# Altium PCB PCB1.PcbDoc (part 1 of 2)
Units mm, origin at the board's own origin, x right, y up, seen from the top; angles counter-clockwise.
Board outline 75.44 x 74.04 mm, 4 copper layers (Top, GND, PWR, Bottom), stack 0.603 mm thick; 52 components, 44 nets, 218 pads, 48 vias.
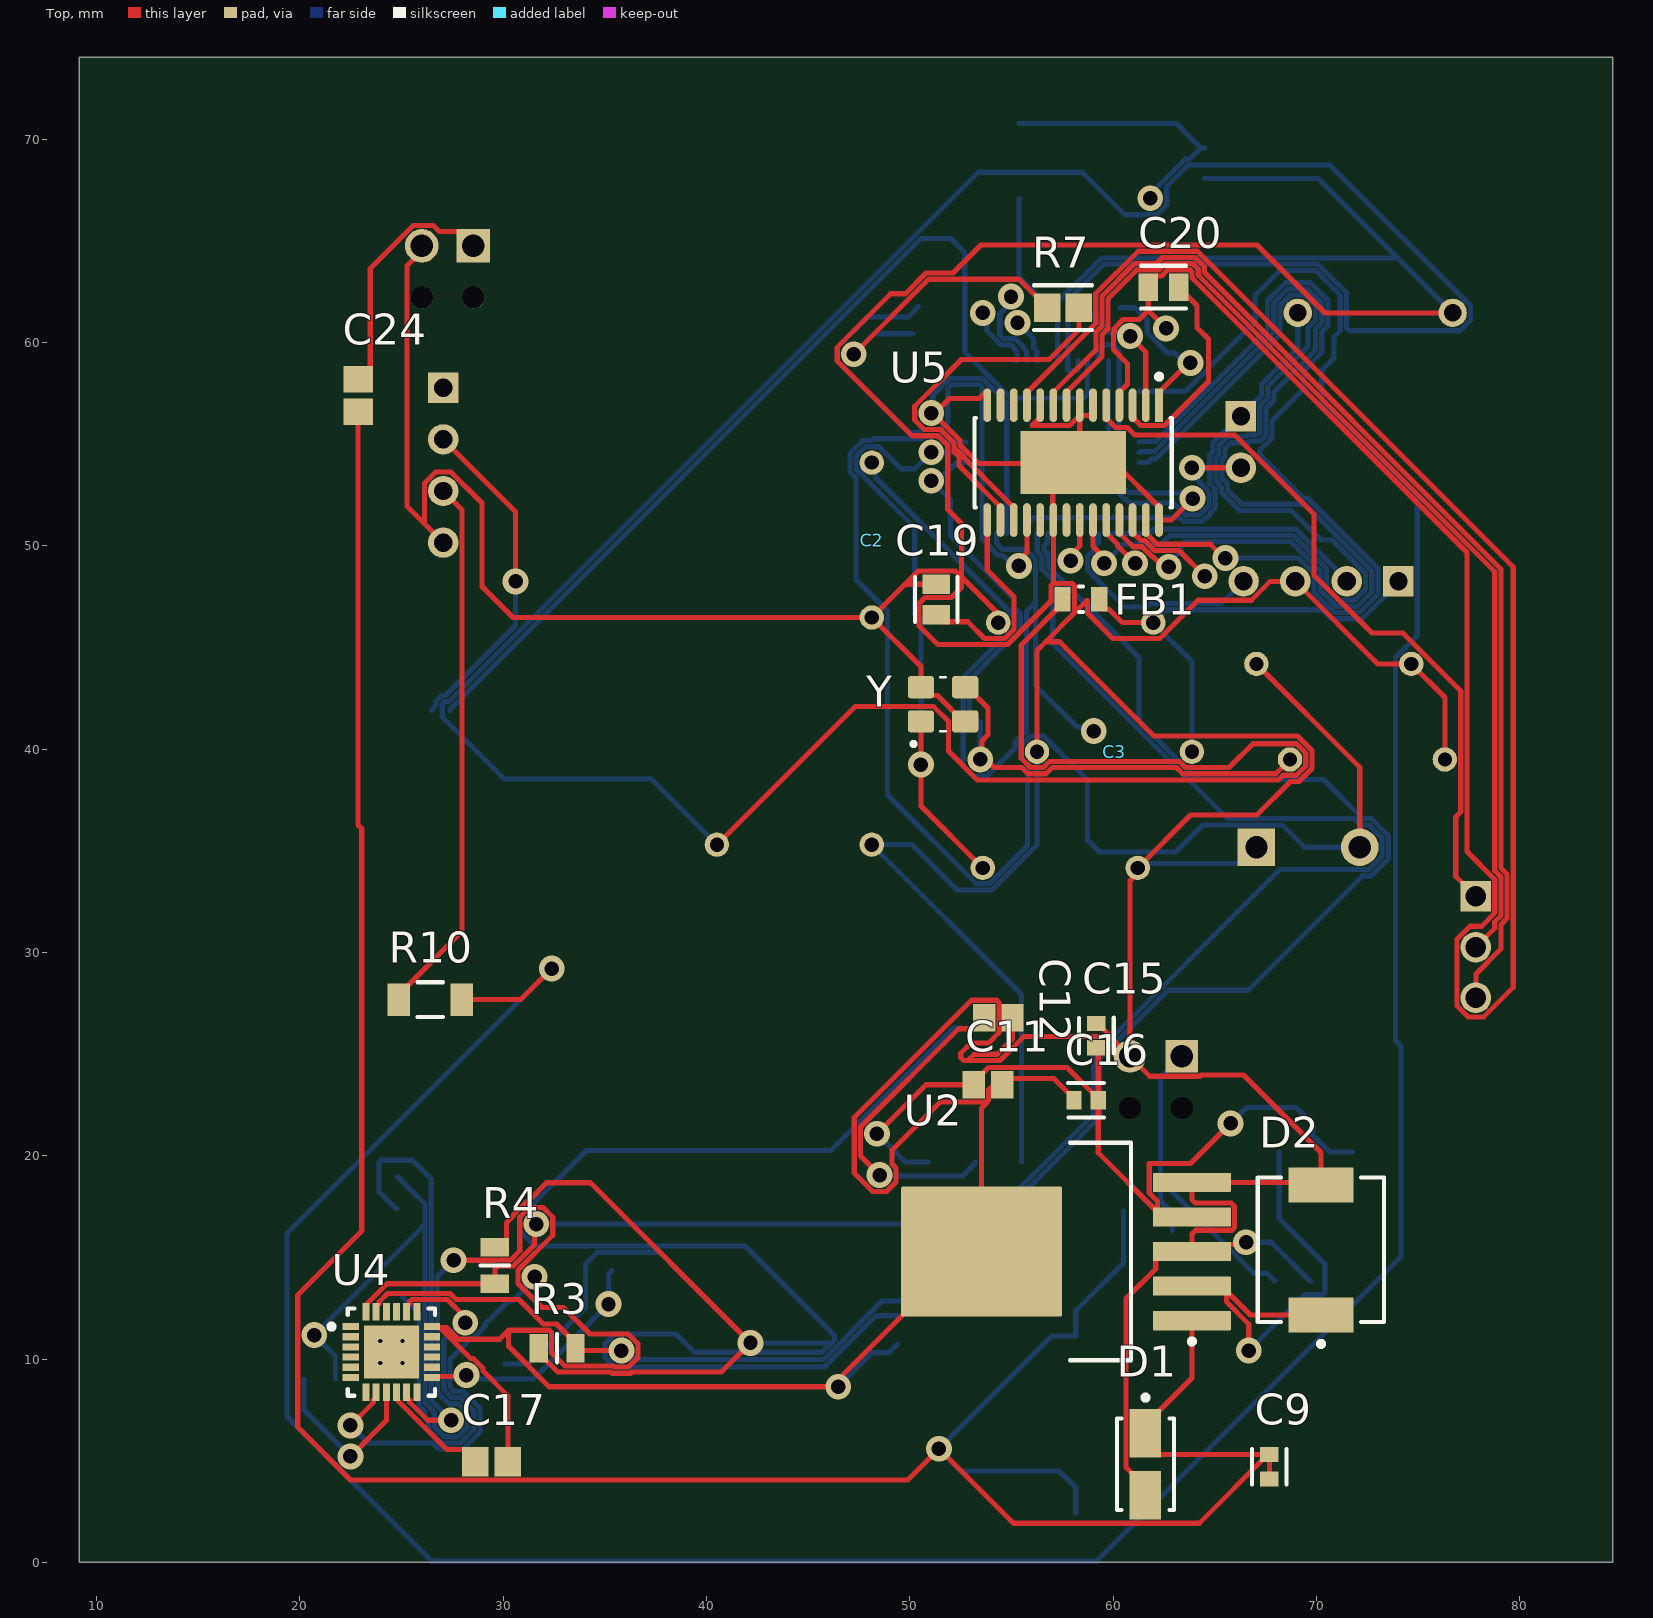
[diagram p0: Top view]
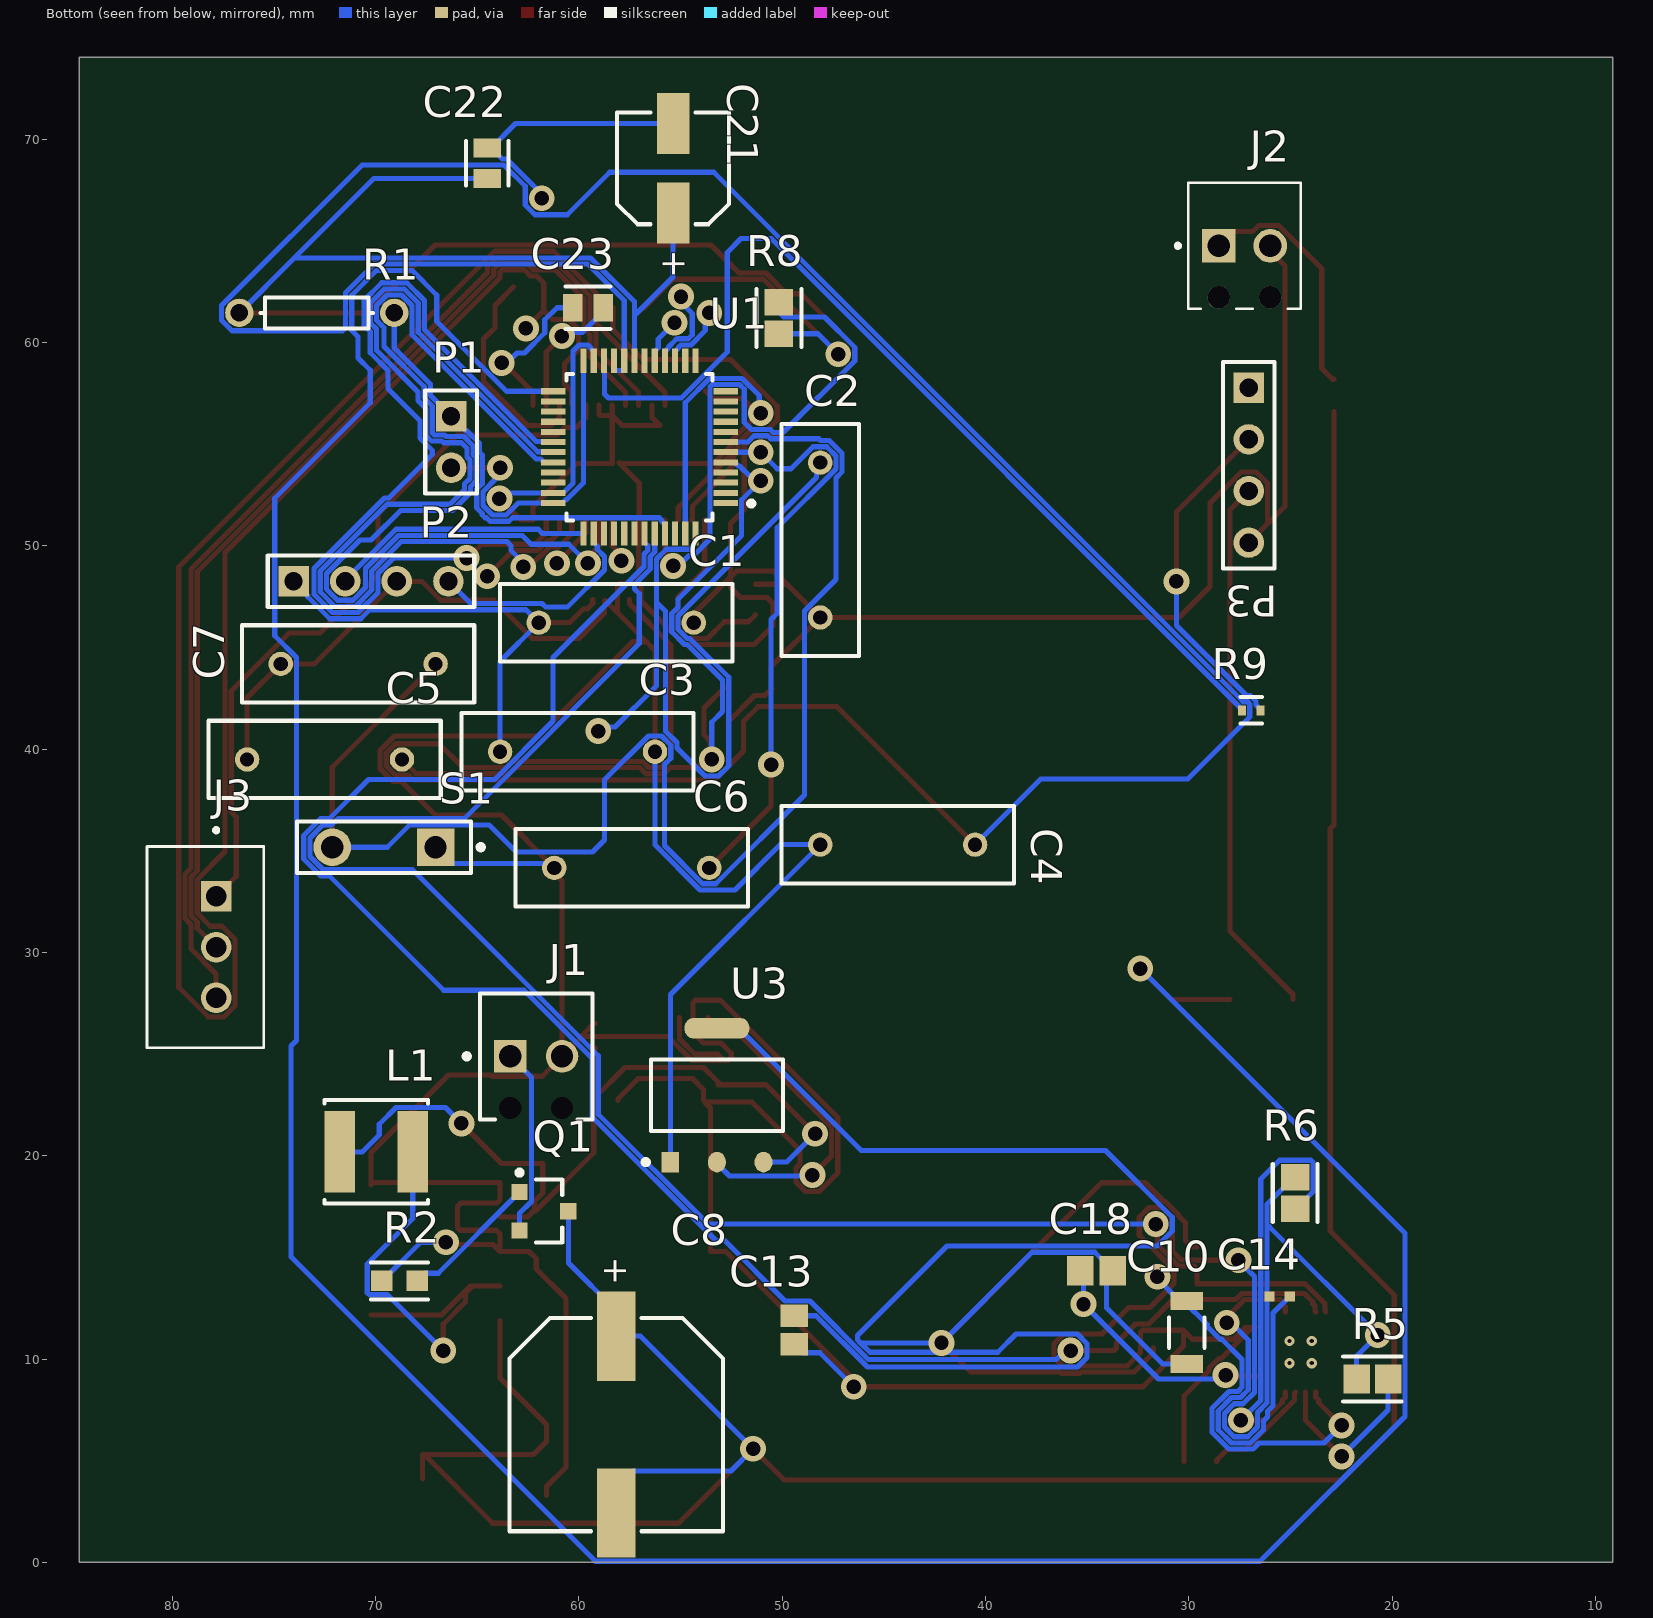
[diagram p1: Bottom view, seen from below]
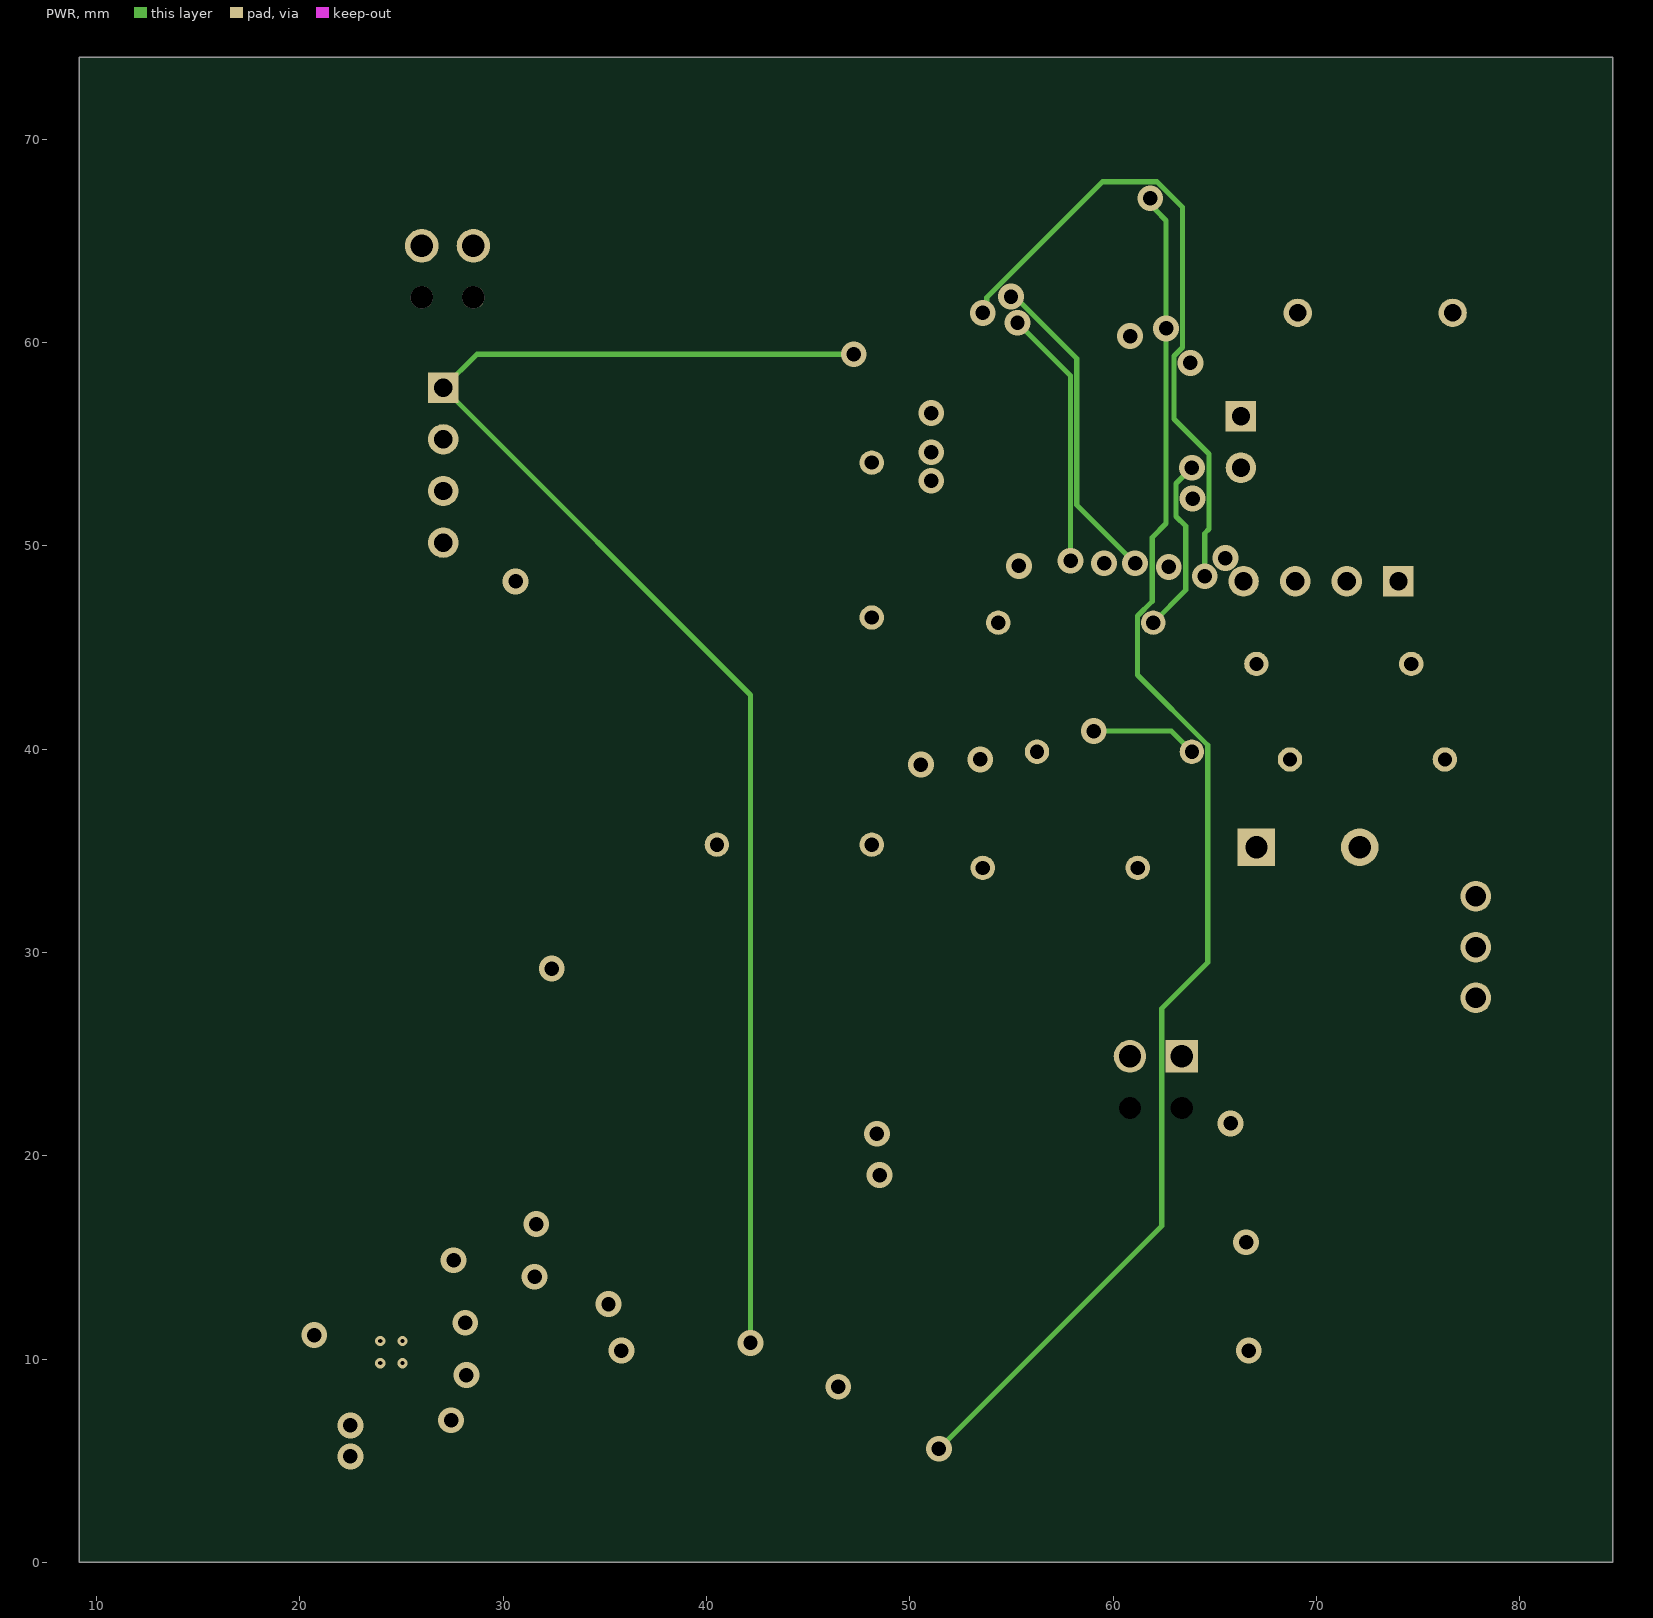
[diagram p2: PWR]
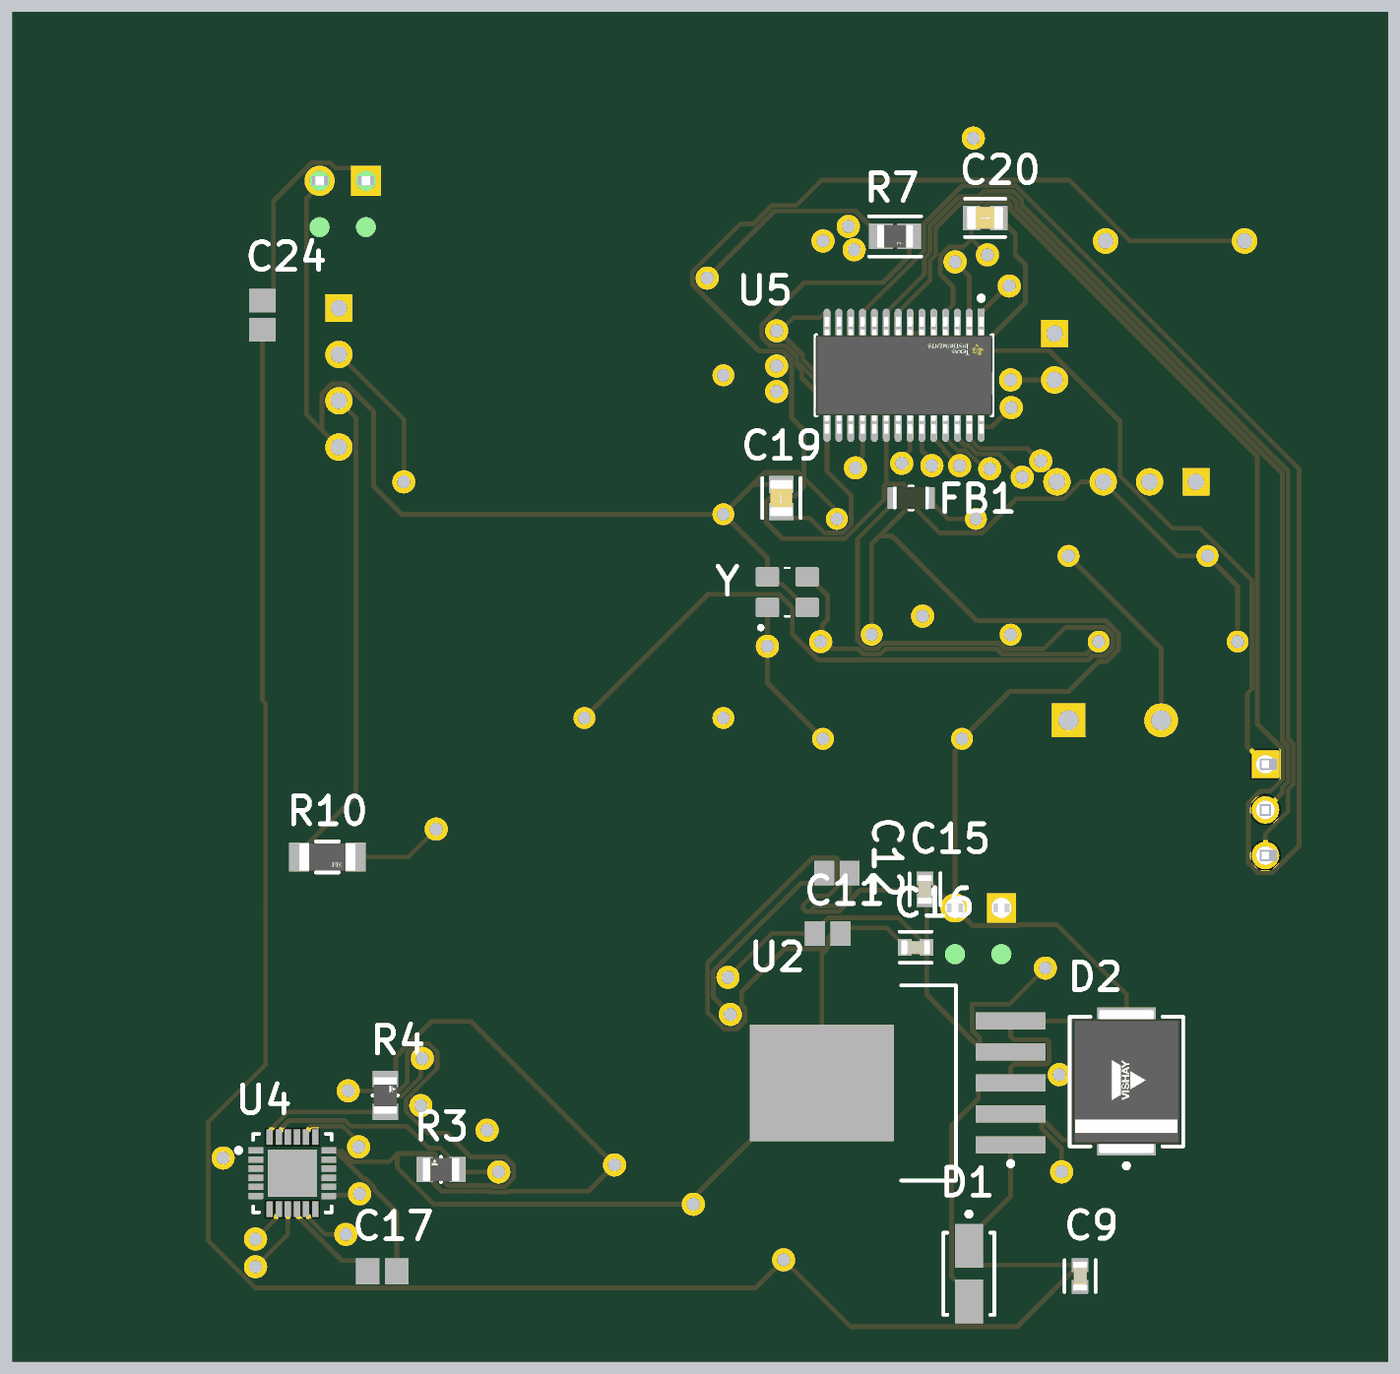
[diagram p3: 3D render of the assembled board from above, using the file's embedded part models]
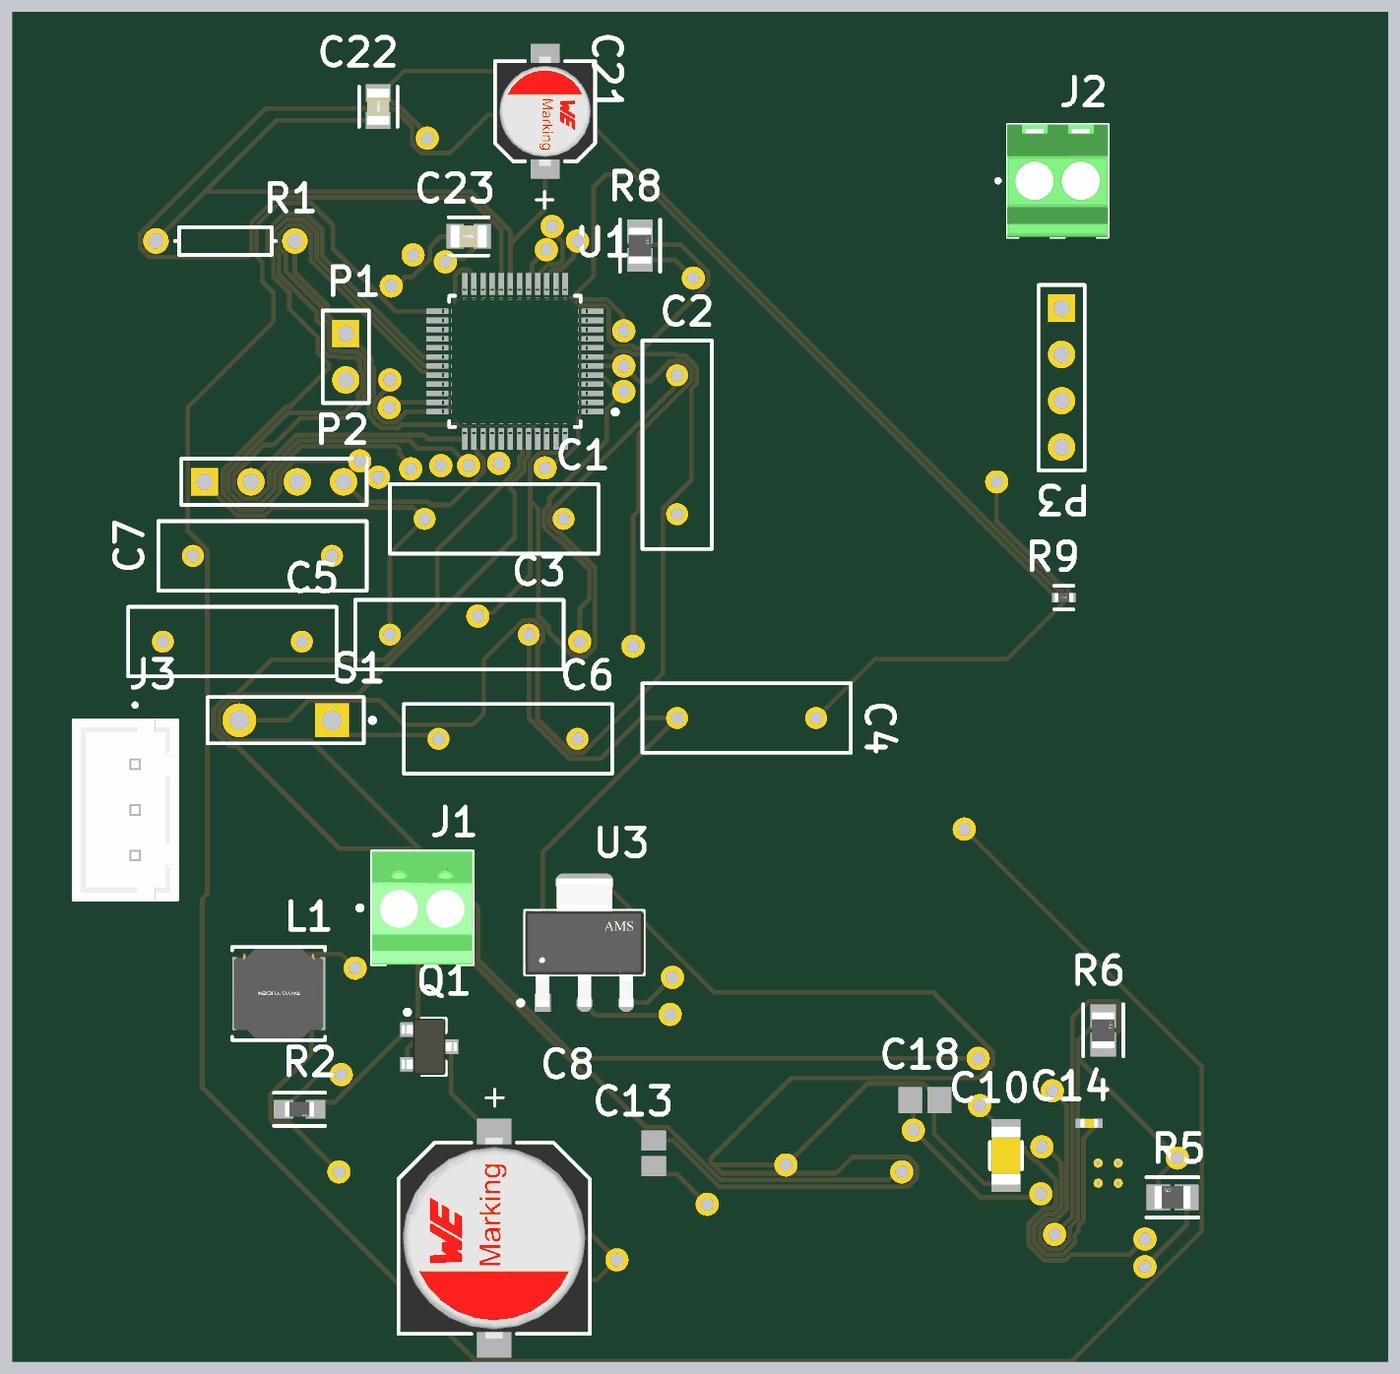
[diagram p4: 3D render of the assembled board from below, using the file's embedded part models]

## Layer stack, top to bottom
Top Solder: solder mask 0.0102, Solder Resist, Dk 3.5
Top: signal copper 0.0356
Dielectric 2: prepreg 0.0711, PP-006, Dk 4.1
GND: signal copper 0.035
Dielectric 1: dielectric 0.32, FR-4, Dk 4.8
PWR: signal copper 0.035
Dielectric 3: prepreg 0.0711, PP-006, Dk 4.1
Bottom: signal copper 0.0356
Bottom Solder: solder mask 0.0102, Solder Resist, Dk 3.5

## Board outline
9.144,0 9.144,74.041 84.582,74.041 84.582,0

## Design rules (kind name [scope] priority, off if disabled: settings)
Clearance [All] p1: gap=0.05 ignorepadtopadclearanceinfootprint=FALSE
HoleToHoleClearance [All] p1: gap=0.1 allowstackedmicrovias=TRUE
MinimumSolderMaskSliver [All] p1: minsoldermaskwidth=0.04
PolygonConnect [All] p1: connectstyle=Relief reliefconductorwidth=0.254 reliefentries=4 polygonreliefangle="90 Angle" airgapwidth=0.254
RoutingVias [All] p1: holewidth=0.711 width=1.27 viastyle="Through Hole" minholewidth=0.711 minwidth=1.27 maxholewidth=0.711 maxwidth=1.27
SilkToSilkClearance [All] p1 off: silktosilkclearance=0.1
SilkToSolderMaskClearance [IsPad] p1 off: minsilkscreentomaskgap=0.05 clearancetoexposedcopper=TRUE
SolderMaskExpansion [All] p1: expansion=0 istentingtop=FALSE
SupplyNets "Schematic Supply Nets_4" [InNet('3V3')] p1: voltage=0.000
SupplyNets "Schematic Supply Nets_3" [InNet('+5')] p2: voltage=0.000
SupplyNets "Schematic Supply Nets_2" [InNet('+3V3')] p3: voltage=0.000
SupplyNets "Schematic Supply Nets_1" [InNet('+12')] p4: voltage=0.000
SupplyNets "Schematic Supply Nets" [InNet('NetC1_1')] p5: voltage=0.000
Width [All] p1: maxlimit=0.254 minlimit=0.254 preferedwidth=0.254
26 further rules are at their usual default settings.

## Classes and differential pairs
component class Power: C8 C9 C11 C12 C13 C15 C16 D1 D2 J1 L1 Q1 R2 U2 U3
component class "Motor Driver": C19 C20 C21 C22 C23 R7 R8 U5
component class MCU: C1 C2 C3 C4 C5 C6 C7 FB1 P1 P2 R1 S1 U1 Y
component class IMU: C10 C14 C17 C18 R3 R4 R5 R6 U4
component class Connectors: C24 J2 J3 P3 R9 R10

## Components (designator, comment, footprint, x,y, rotation, side; value= is the part's Value field where it differs from the comment)
C1 "Cap" RAD-0.3 58.166,46.228 r0 bottom value=100nF
C2 "Cap" RAD-0.3 48.133,50.292 r90 top value=100nF
C3 "Cap" RAD-0.3 60.071,39.878 r0 top value=100nF
C4 "Cap" RAD-0.3 44.323,35.306 r180 bottom value=100nF
C5 "Cap" RAD-0.3 72.517,39.497 r0 bottom value=18pF
C6 "Cap" RAD-0.3 57.404,34.163 r180 bottom value=18pF
C7 "Cap" RAD-0.3 70.866,44.196 r180 bottom value=100nF
C8 "865230457007" WCAP-AS5H_D10H10.5 58.166,6.775 r90 bottom
C9 "C0603C101M5RACTU" FP-C0603C-CF-MFG 67.691,4.699 r270 top value="100 pF"
C10 "885012008050" WCAP-CSGP_1206_L3.2W1.6H0.8 30.099,11.303 r270 bottom
C11 "08055F103KAT2A" CAPC2013X140X50LL20T25 53.848,23.495 r180 top
C12 "08055F103KAT2A" CAPC2013X140X50LL20T25 54.356,26.797 r0 top
C13 "08055F103KAT2A" CAPC2013X140X50LL20T25 49.403,11.43 r270 bottom
C14 "885012205063" WCAP-CSGP_0402_L1W0.5H0.5 25.535,13.081 r180 bottom
C15 "C0603C152K4RACTU" FP-C0603C-CF-MFG 59.182,25.908 r90 top value="1,500 pF"
C16 "C0603C152K4RACTU" FP-C0603C-CF-MFG 58.674,22.733 r180 top value="1,500 pF"
C17 "C0805S104K5RACTU" CAPC2013X145X50NL20T25 29.426,4.953 r180 top
C18 "C0805S104K5RACTU" CAPC2013X145X50NL20T25 34.544,14.351 r0 bottom
C19 "C0805C103K8RACAUTO" FP-C0805C103K8RACAUTO-MFG 51.308,47.371 r90 top
C20 "C0805C103K8RACAUTO" FP-C0805C103K8RACAUTO-MFG 62.484,62.738 r180 top
C21 "865080142007" WCAP-ASLI_D5H5.5 55.372,68.58 r270 bottom
C22 "C0805C103K8RACAUTO" FP-C0805C103K8RACAUTO-MFG 64.516,68.834 r270 bottom
C23 "C0805C103K8RACAUTO" FP-C0805C103K8RACAUTO-MFG 59.563,61.722 r0 bottom
C24 "C0805S104K5RACTU" CAPC2013X145X50NL20T25 22.86,57.404 r90 top
D1 "SMAJ12A-E3/61" VISH-DO-214AC-2_N 61.595,4.826 r270 top
D2 "SS34-E3/9AT" FP-SMC-MFG 70.231,15.367 r90 top
FB1 "MPZ2012S601A" TDK-MPZ2012_V 58.42,47.371 r180 top
J1 "1725656" PHOE-1725656-2 62.103,24.892 r180 bottom
J2 "1725656" PHOENIX_1725656 30.031,61.67 r180 bottom
J3 "B3B-XH-A" JST_B3B-XH-A 78.376,30.266 r90 bottom
L1 "NRS5030T4R7MMGJV" FP-NRS5030-H_3_1-MFG 69.977,20.193 r0 bottom
P1 "Header 2" HDR1X2 66.294,56.388 r270 bottom
P2 "Header 4" HDR1X4 74.041,48.26 r180 bottom
P3 "Header 4" HDR1X4 27.051,57.785 r270 bottom
Q1 "AO3401A" AO-SOT-23-3L_V 61.722,17.272 r180 bottom
R1 "Res1" AXIAL-0.3 72.898,61.468 r0 bottom value=10kOhm
R2 "AC0603JR-7W10KL" FP-AC0603-IPC_A 68.834,13.843 r180 bottom
R3 "MCU08050D2201BP500" FP-MCU0805-MFG 32.65,10.541 r180 top
R4 "MCU08050D2201BP500" FP-MCU0805-MFG 29.591,14.605 r90 top
R5 "RNCP0805JTD10K0" FP-RNCP0805-IPC_B 20.969,9.017 r180 bottom
R6 "RNCP0805JTD10K0" FP-RNCP0805-IPC_B 24.765,18.175 r270 bottom
R7 "RNCP0805JTD10K0" FP-RNCP0805-IPC_B 57.545,61.722 r180 top
R8 "RNCP0805JTD10K0" FP-RNCP0805-IPC_B 50.165,61.214 r270 bottom
R9 "MCR01MZSEF1000" FP-MCR01-MFG 26.924,41.91 r180 bottom
R10 "RNCP1206FTD22R0" FP-RNCP1206-MFG 26.416,27.686 r180 top
S1 "SW-PB" SPST-2 69.596,35.179 r0 bottom
U1 "STM32G431CBT6" FP-LQFP48-5B-MFG 57.023,54.864 r0 bottom
U2 "LM2596S-5.0" KTT0005B_L 57.681,15.289 r180 top
U3 "AMS1117-3.3" FP-AMS1117-IPC_C 53.213,22.98 r90 bottom
U4 "MPU-6050" IS-QFN-24_V 24.499,10.344 r0 top
U5 "DRV8313PWPR" FP-PWP0028C-IPC_B 58.039,54.102 r270 top
Y "TSX-322524.0000MF15X-AC3" OSCCC320X250X60 51.636,42.213 r90 top

## Footprints (in the part's own frame and the unit in brackets; to place one, negate y for a bottom-side part, rotate by r counter-clockwise, add the part's x,y. Pads: shape width x height; smd on the part's side, far side on the other; paste and mask are expansions set on the pad)
AO-SOT-23-3L_V [mm] "SOT23, 3-Leads, Body 3.1x1.8mm, Pitch 0.95mm"
  rect 0.8x0.8 smd: 1(-1.2,0.95) 2(-1.2,-0.95) 3(1.2,0)
  silkscreen extent -1.33,-1.55 0.9,2.02, body extent -1.5,-1.55 1.5,1.55, height 1.25
AXIAL-0.3 [mm] "Axial Device, Thru-Hole; 2 Leads; 0.3 in Pin Spacing"
  round 1.4 hole 0.85: 1(-3.81,0) 2(3.81,0)
  silkscreen extent -2.77,-0.76 2.77,0.76
CAPC2013X140X50LL20T25 [mm] "Chip Capacitor, 2-Leads, Body 2.00x1.25mm, IPC High Density"
  rect 1.1x1.35 smd: 1(-0.7,0) 2(0.7,0)
  body extent -1.1,-0.72 1.1,0.72, height 1.4
CAPC2013X145X50NL20T25 [mm] "Chip Capacitor, 2-Leads, Body 2.00x1.25mm, IPC Medium Density"
  rect 1.3x1.45 smd: 1(-0.8,0) 2(0.8,0)
  body extent -1.1,-0.72 1.1,0.72, height 1.45
FP-AC0603-IPC_A [mm]
  rect 1.059x1.012 smd paste+0 mask+0: 1(-0.877,0) 2(0.877,0)
  silkscreen extent -1.41,-0.91 1.41,0.91, body extent -0.8,-0.4 0.8,0.4, height 0.55
FP-AMS1117-IPC_C [mm]
  rect 1.004x0.872 smd paste+0 mask+0: 1(-3.295,2.29)
  rrect100% 1.004x0.872 smd paste+0 mask+0: 2(-3.295,0) 3(-3.295,-2.29)
  rrect87% 1.004x3.182 smd paste+0 mask+0: 4(3.295,0)
  silkscreen extent -3.42,-3.25 1.75,3.63, body extent -3.53,-3.25 3.53,3.25, height 1.8
FP-C0603C-CF-MFG [mm]
  rect 0.75x0.9 smd paste+0 mask+0: 1(-0.6,0) 2(0.6,0)
  silkscreen extent -0.87,-0.85 0.88,0.85, body extent -1.2,-0.6 1.2,0.6, height 0.25
FP-C0805C103K8RACAUTO-MFG [mm]
  rect 0.95x1.35 smd paste+0 mask+0: 1(-0.75,0) 2(0.75,0)
  silkscreen extent -1.1,-1.05 1.1,1.05, body extent -1.4,-0.85 1.4,0.85, height 0.25
FP-LQFP48-5B-MFG [mm]
  rect 1.2x0.3 smd paste+0 mask+0: 1(-4.25,2.75) 2(-4.25,2.25) 3(-4.25,1.75) 4(-4.25,1.25) 5(-4.25,0.75) 6(-4.25,0.25) 7(-4.25,-0.25) 8(-4.25,-0.75) 9(-4.25,-1.25) 10(-4.25,-1.75) 11(-4.25,-2.25) 12(-4.25,-2.75) 25(4.25,-2.75) 26(4.25,-2.25) 27(4.25,-1.75) 28(4.25,-1.25) 29(4.25,-0.75) 30(4.25,-0.25) 31(4.25,0.25) 32(4.25,0.75) 33(4.25,1.25) 34(4.25,1.75) 35(4.25,2.25) 36(4.25,2.75)
  rect 0.3x1.2 smd paste+0 mask+0: 13(-2.75,-4.25) 14(-2.25,-4.25) 15(-1.75,-4.25) 16(-1.25,-4.25) 17(-0.75,-4.25) 18(-0.25,-4.25) 19(0.25,-4.25) 20(0.75,-4.25) 21(1.25,-4.25) 22(1.75,-4.25) 23(2.25,-4.25) 24(2.75,-4.25) 37(2.75,4.25) 38(2.25,4.25) 39(1.75,4.25) 40(1.25,4.25) 41(0.75,4.25) 42(0.25,4.25) 43(-0.25,4.25) 44(-0.75,4.25) 45(-1.25,4.25) 46(-1.75,4.25) 47(-2.25,4.25) 48(-2.75,4.25)
  silkscreen extent -5.62,-3.6 3.6,3.6, body extent -4.5,-4.5 4.5,4.5, height 1.6
FP-MCR01-MFG [mm]
  rect 0.4x0.5 smd paste+0 mask+0: 1(-0.45,0) 2(0.45,0)
  silkscreen extent -0.53,-0.65 0.53,0.65, body extent -0.5,-0.25 0.5,0.25, height 0.4
FP-MCU0805-MFG [mm]
  rect 0.9x1.4 smd paste+0 mask+0: 1(-0.9,0) 2(0.9,0)
  silkscreen extent 0,-0.7 0,0.7, body extent -1.45,-0.8 1.45,0.8, height 0.25
FP-NRS5030-H_3_1-MFG [mm]
  rect 1.5x4 smd paste+0 mask+0: 1(-1.8,0) 2(1.8,0)
  silkscreen extent -2.55,-2.55 2.55,2.55, body extent -2.45,-2.45 2.45,2.45, height 3.1
FP-PWP0028C-IPC_B [mm]
  rect 1.655x0.381 smd paste+0 mask+0: 1(-2.825,4.225)
  rrect100% 1.655x0.381 smd paste+0 mask+0: 2(-2.825,3.575) 3(-2.825,2.925) 4(-2.825,2.275) 5(-2.825,1.625) 6(-2.825,0.975) 7(-2.825,0.325) 8(-2.825,-0.325) 9(-2.825,-0.975) 10(-2.825,-1.625) 11(-2.825,-2.275) 12(-2.825,-2.925) 13(-2.825,-3.575) 14(-2.825,-4.225) 15(2.825,-4.225) 16(2.825,-3.575) 17(2.825,-2.925) 18(2.825,-2.275) 19(2.825,-1.625) 20(2.825,-0.975) 21(2.825,-0.325) 22(2.825,0.325) 23(2.825,0.975) 24(2.825,1.625) 25(2.825,2.275) 26(2.825,2.925) 27(2.825,3.575) 28(2.825,4.225)
  rect 3.1x5.18 smd paste-1000 mask+0: 29(0,0)
  silkscreen extent -4.35,-4.85 2.2,4.85, body extent -3.9,-5.1 3.9,5.1, height 0.25
FP-RNCP0805-IPC_B [mm]
  rect 1.305x1.408 smd paste+0 mask+0: 1(-0.776,0) 2(0.776,0)
  silkscreen extent -1.43,-1.1 1.43,1.1, body extent -1,-0.63 1,0.63, height 0.65
FP-RNCP1206-MFG [mm]
  rect 1.1x1.6 smd paste+0 mask+0: 1(-1.55,0) 2(1.55,0)
  silkscreen extent -0.63,-0.85 0.63,0.85, body extent -2.2,-0.95 2.2,0.95, height 0.25
FP-SMC-MFG [mm]
  rect 1.72x3.2 smd paste+0 mask+0: 1(-3.205,0) 2(3.205,0)
  silkscreen extent -4.75,-3.11 3.55,3.11, body extent -4.17,-3.21 4.17,3.21, height 0.25
HDR1X2 [mm] "Connector; Header; 2 Position"
  rect 1.5x1.5 hole 0.9: 1(0,0)
  round 1.5 hole 0.9: 2(2.54,0)
  silkscreen extent -1.27,-1.27 3.81,1.27
HDR1X4 [mm] "Connector; Header; 4 Position"
  rect 1.5x1.5 hole 0.9: 1(0,0)
  round 1.5 hole 0.9: 2(2.54,0) 3(5.08,0) 4(7.62,0)
  silkscreen extent -1.27,-1.27 8.89,1.27
IS-QFN-24_V [mm] "QFN, 24-Leads, Body 4x4mm, Pitch 0.5mm, Thermal Pad 2.7x2.6mm"
  rect 0.8x0.35 smd: 1(-2,1.25) 2(-2,0.75) 3(-2,0.25) 4(-2,-0.25) 5(-2,-0.75) 6(-2,-1.25) 13(2,-1.25) 14(2,-0.75) 15(2,-0.25) 16(2,0.25) 17(2,0.75) 18(2,1.25)
  rect 0.35x0.85 smd mask+0.102: 7(-1.25,-1.975) 8(-0.75,-1.975) 9(-0.25,-1.975) 10(0.25,-1.975) 11(0.75,-1.975) 12(1.25,-1.975) 19(1.25,1.975) 20(0.75,1.975) 21(0.25,1.975) 22(-0.25,1.975) 23(-0.75,1.975) 24(-1.25,1.975)
  rect 2.7x2.6 smd: 25(0,0)
  silkscreen extent -3.07,-2.15 2.15,2.15, body extent -2,-2 2,2, height 0.95
JST_B3B-XH-A [mm]
  rect 1.508x1.508 / inner round 1.508 / far side rect 1.508x1.508 hole 1 mask+0.102: 1(2.5,-0.525)
  round 1.508 hole 1 mask+0.102: 2(0,-0.525) 3(-2.5,-0.525)
  silkscreen extent -4.95,-2.88 5.85,2.88, body extent -4.95,-2.88 4.95,2.88, height 7
KTT0005B_L [mm] "DPAK, 5-Leads, Body 10.65x9.65mm, Pitch 1.7mm, IPC High Density"
  rrect11% 3.85x0.95 smd: 1(-6.2,3.4) 2(-6.2,1.7) 3(-6.2,0) 4(-6.2,-1.7) 5(-6.2,-3.4)
  rrect2% 7.9x6.4 smd: 6(4.15,0)
  silkscreen extent -6.33,-5.35 -0.2,5.35, body extent -3.2,-5.32 6.45,5.33, height 4.83
OSCCC320X250X60 [mm]
  rrect25% 1.09x1.29 smd: 1(-0.84,1.09) 2(-0.84,-1.09) 3(0.84,-1.09) 4(0.84,1.09)
  silkscreen extent -2.05,-0.13 1.33,1.55
PHOE-1725656-2 [mm] "Connector, 2-Leads, Body 6.2x5.4mm, Pitch 2.54mm"
  rect 1.6x1.6 hole 1.1: 1(-1.27,0)
  round 1.6 hole 1.1: 2(1.27,0)
  round 0 hole 1.1 unplated: MH1(-1.27,-2.54) MH2(1.27,-2.54)
  silkscreen extent -3.55,-3.1 2.77,3.1, body extent -2.77,-3.1 2.77,3.1, height 9
PHOENIX_1725656 [mm]
  rect 1.65x1.65 / inner round 1.65 / far side rect 1.65x1.65 hole 1.1: 1(1.5,3.1)
  round 1.65 hole 1.1: 2(4.04,3.1)
  round 1.1 hole 1.1 unplated: ""(1.5,0.56) ""(4.04,0.56)
  silkscreen extent -0.6,0 5.54,6.2, body extent 0,0 5.54,6.2, height 8.65
RAD-0.3 [mm] "Radial Cap, Thru-Hole; 2 Leads; 0.3 in Pin Spacing"
  round 1.2 hole 0.7: 1(-3.81,0) 2(3.81,0)
  silkscreen extent -5.71,-1.91 5.71,1.91
SPST-2 [mm] "Switch; 2 Leads"
  rect 1.85x1.85 hole 1.1: 1(-2.54,0)
  round 1.85 hole 1.1: 2(2.54,0)
  silkscreen extent -4.89,-1.27 4.28,1.27
TDK-MPZ2012_V [mm] "SMD, 2-Leads, Body 2x1.25mm"
  rect 0.8x1.2 smd: 1(-0.9,0) 2(0.9,0)
  silkscreen extent -0.1,-0.63 0.1,0.63, body extent -1,-0.63 1,0.63, height 1.05
VISH-DO-214AC-2_N [mm] "DO-214AC, 2-Leads, Body 4.5x2.79mm, IPC Medium Density"
  rect 2.4x1.55 smd: 1(-1.525,0) 2(1.525,0)
  silkscreen extent -3.4,-1.4 2.25,1.4, body extent -2.25,-1.4 2.25,1.39, height 2.29
WCAP-AS5H_D10H10.5 [mm] "Aluminum Electrolytic Capacitors, 10x10.5mm"
  rect 4.4x1.9 smd: 1(4.35,0) 2(-4.35,0)
  silkscreen extent -5.25,-5.25 5.25,5.25, body extent -5.5,-5.15 5.5,5.15, height 10.5
WCAP-ASLI_D5H5.5 [mm] "Aluminium Electrolytic V-Chip SMT Capacitors, 5x5.5mm"
  rect 3x1.6 smd: 1(2.2,0) 2(-2.2,0)
  silkscreen extent -2.75,-2.75 2.75,2.75, body extent -3,-2.65 3,2.65, height 5.5
WCAP-CSGP_0402_L1W0.5H0.5 [mm] "Ceramic Capacitors, body 1x0.5mm"
  rect 0.5x0.5 smd: 1(-0.5,0) 2(0.5,0)
  body extent -0.5,-0.25 0.5,0.25, height 0.5
WCAP-CSGP_1206_L3.2W1.6H0.8 [mm] "Ceramic Capacitors, body 3.2x1.6mm"
  rect 0.9x1.6 smd: 1(-1.55,0) 2(1.55,0)
  silkscreen extent -0.75,-0.87 0.75,0.87, body extent -1.6,-0.8 1.6,0.8, height 0.8

## Part data
C1 C2 C3 C4 C5 C6 C7: "Capacitor", LatestRevisionDate=17-Jul-2002, LatestRevisionNote="Re-released for DXP Platform.", PackageDescription="Radial Cap, Thru-Hole; 2 Leads; 0.3 in Pin Spacing", PackageReference=RAD-0.3, Published=8-Jun-2000, Publisher="Altium Limited"
C8: library part CMP-03913-53914686-2, "WCAP-AS5H Aluminum Electrolytic Capacitors", Capacitance=220µF, Case/Package=Radial, Leakage Current=55µA, Max Operating Temperature=105°C, Min Operating Temperature=-40°C, Ripple Current=240mA, Tolerance=20%, Voltage Rating=25V, Insulation Resistance=454.545kΩ, Diameter=10mm, Height=10.5mm, Height - Seated (Max)=10.4902mm, Length=10.5mm, Life (Hours)=5000hours, Mount="Surface Mount", Polarity=Polar, REACH SVHC=Unknown, Ripple Current (AC)=240mA, RoHS=Compliant, Voltage Rating (DC)=25V, Width=10.3mm
C9: library part CMP-03020-033322-1, "CAP CER 100PF 50V X7R 0603", Capacitance="100 pF", Manufacturer=KEMET, Package=C0603C-CF, Temperature="-55°C to +125°C", Temperature Characteristic=X7R, Temperature Coefficient=30ppm/°C, Temperature Range High=+125°C, Temperature Range Low=-55°C, Tolerance=0.2, Voltage Rating="50 V", Automotive=Yes, Automotive Grade="Grade 1", Category=Cap, ComponentLink2Description=Datasheet, ComponentLink2URL=https://api.kemet.com/component-edge/download/datasheet/C0603C100J5GACAUTO.pdf, Device Class L1="Passive Components", Device Class L2=Capacitors, Device Class L3="Ceramic Capacitors", Digikey Description="CAP CER 100PF 50V X7R 0603", Height=0.87mm, Lead Free=Yes, Manufacturer Part Number=C0603C101M5RACTU, Material=Ceramic, Mouser Description="Cap Ceramic 100pF 50V X7R 20% SMD 0603 125°C Punched Paper T/R", Octopart=https://octopart.com/c0603c101m5ractu-kemet-12542883, RoHS=TRUE
C10: library part CMP-03913-65419687-2, "WCAP-CSGP 1206 (3216Metric) Ceramic Capacitor 0.126Lx0.063W 3.20mmx1.60mm C0G NP0 ±5% 1500pF", Capacitance=1.5nF, Case Code (Metric)=3216, Case Code (Imperial)=1206, Max Operating Temperature=125°C, Min Operating Temperature=-55°C, Tolerance=5%, Voltage Rating=50V, Insulation Resistance=10GΩ, Case/Package=1206, Height=800µm, Length=3.2mm, Mount="Surface Mount", RoHS=Compliant, Thickness=889µm, Width=1.6mm
C11 C12 C13: library part CMP-2007-04788-1, Manufacturer="AVX Interconnect / Elco", Part Number=08055F103KAT2A
C14: library part CMP-03913-53703200-2, "Cap Ceramic 0.0022uF 50V X7R 10% Pad SMD 0402 125C T/R", Capacitance=2.2nF, Case Code (Metric)=1005, Case Code (Imperial)=0402, Max Operating Temperature=125°C, Min Operating Temperature=-55°C, Tolerance=10%, Voltage Rating=50V, Insulation Resistance=10GΩ, Case/Package=0402, Height=500µm, Length=1mm, Mount="Surface Mount", Packaging="Tape & Reel (TR)", RoHS=Compliant, Thickness=558.8µm, Width=500µm
C15 C16: library part CMP-2006-03092-2, "CAP CER 1500PF 16V 10% X7R 0603", Capacitance="1,500 pF", Manufacturer=KEMET, Package=C0603C-CF, Temperature="-55°C to +125°C", Temperature Characteristic=X7R, Temperature Coefficient=30ppm/°C, Temperature Range High=+125°C, Temperature Range Low=-55°C, Tolerance=0.1, Voltage Rating="16 V", Automotive=Yes, Automotive Grade="Grade 1", Category=Cap, ComponentLink2Description=Datasheet, ComponentLink2URL=https://api.kemet.com/component-edge/download/datasheet/C0603C100J5GACAUTO.pdf, Device Class L1="Passive Components", Device Class L2=Capacitors, Device Class L3="Ceramic Capacitors", Digikey Description="CAP CER 1500PF 16V 10% X7R 0603", Height=0.87mm, Lead Free=Yes, Manufacturer Part Number=C0603C152K4RACTU, Material=Ceramic, Mouser Description="Multilayer Ceramic Capacitors MLCC - SMD/SMT 16volts 1500pF X7R 10%", Octopart=https://octopart.com/c0603c152k4ractu-kemet-12574005, RoHS=TRUE
C17 C18 C24: library part CMP-2007-01227-1, Manufacturer=Kemet, Part Number=C0805S104K5RACTU
C19 C20 C22 C23: library part CMP-00212-126448506-1, "C0805C103K8RACAUTO Cap, 0.01UF, 10V, Mlcc, 0805 Rohs Compliant: Yes", Capacitance=10nF, Case/Package=0805, Dielectric=X7R, Max Operating Temperature=125°C, Min Operating Temperature=-55°C, Tolerance=10%, Voltage Rating=10V, Height=880µm, Material=Ceramic, NexarPartId=126448506, RoHS=Compliant, Voltage Rating (DC)=10V
C21: library part CMP-03913-53914538-2, "Alum. Electrolytic Cap 100UF 25V 5MMV-CHIP Wcap-asli, Lifetime 2000H +105OC", Capacitance=100µF, Case/Package=Radial, ESR (Equivalent Series Resistance)=699.36mΩ, Leakage Current=6.3µA, Max Operating Temperature=105°C, Min Operating Temperature=-55°C, Ripple Current=170mA, Tolerance=20%, Voltage Rating=6.3V, Insulation Resistance=1MΩ, Diameter=5mm, Height=5.5mm, Height - Seated (Max)=5.5118mm, Length=5.5mm, Life (Hours)=2000hours, Mount="Surface Mount", Polarity=Polar, REACH SVHC=Unknown, Ripple Current (AC)=170mA, RoHS=Compliant, Voltage Rating (DC)=6.3V, Width=5.3mm, Impedance=800mΩ
D1: library part CMP-0544-00020-2, "Transient Voltage Suppressor, 6.40 to 231 V, 12 V Stand-off Voltage, Uni-Directional, -55 to 155 degC, 2-pin DO-214AC, Pb-Free, Tape and Reel", Manufacturer="Vishay Semiconductor", Operating Junction and Storage Temperature Range="-55 to 150 degC", ComponentLink1Description="Manufacturer URL", ComponentLink1URL=http://www.vishay.com/, ComponentLink2Description=Datasheet, ComponentLink2URL=http://www.vishay.com/docs/88390/smaj50a.pdf, ComponentLink3Description="Package Specification", ComponentLink3URL=http://www.vishay.com/docs/88390/smaj50a.pdf, DatasheetVersion=12/8/2013, Mounting Technology="Surface Mount", PackageDescription="2-Pin DO-214AC (SMA), Body 4.245 x 2.665 mm", PackageReference=DO-214AC-2, Packing="Tape and Reel", PartNumber=SMAJ12A-E3/61, PPPM (W)="400, 300", RoHS=TRUE, VBR Uni-Directional (V)="6.4 to 231", VWM (V)=12, ID (uA)=1, IFSM="40 A"
D2: library part CMP-02539-000066-1, "DIODE SCHOTTKY 40V 3A DO214AB", Average Rectified Current=3A, Case/Package=SMC, Forward Voltage=500mV, Max Operating Temperature=125°C, Max Repetitive Reverse Voltage (Vrrm)=40V, Max Reverse Current=500uA, Max Surge Current=100A, Min Operating Temperature=-55°C, Package Quantity=3500, Element Configuration=Single, Forward Current=3A, Max Reverse Leakage Current=500uA, Max Reverse Voltage (DC)=40V, Mount="Surface Mount", Number of Pins=2, Packaging="Tape and Reel", Peak Non-Repetitive Surge Current=100A, Radiation Hardening=No, RoHS Compliant=Yes, Series=-
FB1: library part CMP-2000-05400-1, "Chip Bead for Power Line, 600 Ohm, +/- 25%, 2 A, -55 to 125 degC, 2-Pin SMD (0805), RoHS, Tape and Reel", Case Height=0.85mm, Case Length=2mm, Case Width=1.25mm, Manufacturer=TDK, Maximum DC Current=2A, Maximum DC Resistance=100mOhms, Operating Temperature Range=-55Cto+125C, Package / Case=0805(2012metric), Package Description="2-Pin Surface Mount Device, Body 2 x 1.25 mm", Package Reference=805, Test Frequency=100MHz, Tolerance=25%, Brand=TDK, Datasheet URL=https://datasheet.ciiva.com/23763/1750041-23763249.pdf, Datasheet Version=Jul-13, Dimensions=1.25mmWx2mmLx0.85mmH, Factory Pack Quantity=4000, Manufacturer URL=http://www.tdk.com/, Packaging=Reel, Product=FerriteChipBeads, Product Category=EMIFilterBeads,Chips&Arrays, RoHS=Details, Termination Style=SMD/SMT, Impedance=600Ohms
J1: library part CMP-2000-05299-1, "Male Header, Pitch 2.54 mm, 1 x 2 Position, Height 9 mm, Tail Length 3.5 mm", Colour=Green, Manufacturer="Phoenix Contact", Content=250pc(s), Datasheet URL=http://datasheet.octopart.com/1725656-Phoenix-Contact-datasheet-5302866.pdf, Datasheet Version=Apr-08, Manufacturer part No.=1725656, Manufacturer URL=http://www.phoenixcontact.com/, Number Of Contacts=2, Pitch=2.54mm, Type=MPT0,5/2-2,54, Industrial packaging=Yes
J2: "PCB Terminal Screw 2.54mm 20AWG 160V 6A 2 Position COMBICON MPT Series", Package=None, Check_prices=https://www.snapeda.com/parts/1725656/Phoenix+Contact/view-part/?ref=eda, MF="Phoenix Contact", MP=1725656, SnapEDA_Link=https://www.snapeda.com/parts/1725656/Phoenix+Contact/view-part/?ref=snap
J3: "Connector Header Through Hole 3 position 0.098 (2.50mm)", Package=None, Check_prices=https://www.snapeda.com/parts/B3B-XH-A/JST/view-part/?ref=eda, MF="JST Sales", MP=B3B-XH-A, SnapEDA_Link=https://www.snapeda.com/parts/B3B-XH-A/JST/view-part/?ref=snap
L1: library part CMP-14484-000888-1, "Inductor Power Shielded Wirewound 4.7uH 20% 100KHz Ferrite 2.6A 45.5mΩ DCR Automotive T/R", Case/Package=Nonstandard, Current Rating=2.6A, DC Resistance (DCR)=45.5mR, Max Operating Temperature=125°C, Min Operating Temperature=-40°C, Package Quantity=500, Ratings=AEC-Q200, Resistor Type=Wirewound, Saturation Current=3.1A, Self Resonant Frequency=31MHz, Test Frequency=100kHz, Tolerance=20%, Inductance=4.7uH, Core Material=Ferrite, Depth=4.9mm, Halogen Free="Halogen Free", Height - Seated (Max)=0.118inch, Length=0.193inch, Max DC Current=2.6A, Mount="Surface Mount", Packaging="Cut Tape", Radiation Hardening=No, RoHS Compliant=Yes, Shielding=Shielded, Width=0.193inch
P1: "Header, 2-Pin", LatestRevisionDate=17-Jul-2002, LatestRevisionNote="Re-released for DXP Platform.", Publisher="Altium Limited"
P2 P3: "Header, 4-Pin", LatestRevisionDate=17-Jul-2002, LatestRevisionNote="Re-released for DXP Platform.", Publisher="Altium Limited"
Q1: library part CMP-2000-05778-1, "P-Channel MOSFET, 30 V, 4 A, -55 to 150 degC, 3-Pin SOT-23-3L, RoHS, Tape and Reel", Continuous Drain Current=4A, Drain-Source On-Volt=30V, Frequency (Max)=NotRequiredMHz, Gate-Source Voltage (Max)=?12V, Manufacturer="Alpha and Omega", Operating Temp Range=-55Cto150C, Operating Temperature Classification=Military, Output Power (Max)=NotRequiredW, Package Description="3-Pin Small Outline Transistor, Body 2.95 x 1.6 mm, Pitch 0.95 mm", Package Reference=SOT-23-3L, Package Type=SOT-23, Power Dissipation=1.4W, Power Gain=NotRequireddB, Channel Mode=Enhancement, Datasheet URL=http://www.aosmd.com/res/data_sheets/AO3401A.pdf, Datasheet Version="Rev. 3, 03/2011", Drain Current (Max)=4A, Drain Efficiency=NotRequired%, Drain-Source On-Res=0.044ohm, Manufacturer URL=http://www.aosmd.com/, Mounting=SurfaceMount, Mounting Technology=SurfaceMount, Noise Figure=NotRequireddB, Number of  Elements=1, Package URL=http://www.aosmd.com/res/packaging_information/SOT-23-3L.pdf, Pin Count=3, Polarity=P, Rad Hardened=No, Type=PowerMOSFET
R1: "Resistor", LatestRevisionDate=17-Jul-2002, LatestRevisionNote="Re-released for DXP Platform.", PackageDescription="Axial Device, Thru-Hole; 2 Leads; 0.3 in Pin Spacing", PackageReference=AXIAL-0.3, Published=8-Jun-2000, Publisher="Altium Limited"
R2: library part CMP-03412-040683-1, "RES 10kΩ 5.00% 0.2W 0603"
R3 R4: library part CMP-02407-001865-1, "RES 1.05K OHM 0.5% 1/5W 0805", Case/Package=0805, Max Operating Temperature=125°C, Max Power Dissipation=125mW, Min Operating Temperature=-55°C, Package Quantity=5000, Resistance=2.2kR, Temperature Coefficient=25ppm/°C, Tolerance=0.1%, Composition="Thin Film", Depth=1.25mm, Height=0.022inch, Lead Free="Lead Free", Length=0.079inch, Military Standard=Not, Number of Terminations=2, Packaging="Tape and Reel", Width=0.049inch
R5 R6 R7 R8: library part CMP-26527-002868-1, "10kΩ ±5% 0.25W 0805 High Power Anti-Sulfur Thin Film Chip Resistor", Max Operating Temperature=155°C, Min Operating Temperature=-55°C, Tolerance=5%, Mount="Surface Mount", RoHS Compliant=Yes
R9: library part CMP-08839-014919-1, "Thick Film Chip Resistor, 0402, 100Ω, 1%, 100ppm/°C, 0.063W, 50V"
R10: library part CMP-26527-002781-1, "22Ω ±1% 0.5W 1206 High Power Anti-Sulfur Thin Film Chip Resistor", Max Operating Temperature=155°C, Min Operating Temperature=-55°C, Tolerance=1%, Mount="Surface Mount", RoHS Compliant=Yes
S1: "Switch", LatestRevisionDate=17-Jul-2002, LatestRevisionNote="Re-released for DXP Platform.", PackageDescription="Switch; 2 Leads", PackageReference=SPST-2, Published=24-Mar-1999, Publisher="Altium Limited"
U1: library part CMP-12105-000030-1, "MAINSTREAM ARM CORTEX-M4+ MCU 17", Ambient Temperature Range High=+85°C, Ambient Temperature Range Low=-40°C, Frequency=170MHz, Manufacturer=STMicroelectronics, Max Junction Temp=+105°C, Max Supply Voltage=3.6V, Min Supply Voltage=1.62V, Package=LQFP48-5B, Temperature="-40°C to +85°C", Automotive=No, Category=IC, ComponentLink2Description=Datasheet, ComponentLink2URL=https://www.st.com/resource/en/datasheet/stm32g431cb.pdf, Core Architecture="Arm Cortex-M4", Data Bus Width=32bits, Device Class L1="Integrated Circuits (ICs)", Device Class L2="Embedded Processors and Controllers", Device Class L3=Microcontrollers, Digikey Description="MAINSTREAM ARM CORTEX-M4+ MCU 17", Height=1.6mm, Lead Free=Yes, Manufacturer Part Number=STM32G431CBT6, Memory Size=128KBytes, Memory Type=FLASH, Number Of A/D Converters=1, Number Of Adc Channels=17, Number Of Cores=1, Number Of Pwm Channels=31, Number Of Spi Channels=3, Number Of Timers/Counters=14, Number Of Uart Channels=4, Number Of Usb Channels=1, Number Of I2C Channels=3, Number Of I/Os=38, Octopart=https://octopart.com/stm32g431cbt6-stmicroelectronics-98835224, Ram Size=32KBytes, RoHS=TRUE, Standoff Height=0.05mm, Temperature Range High=+85°C, Temperature Range Low=-40°C, Interface=I2C,SPI,UART,USART,CAN,USB,LIN,IrDA,I2S
U2: library part CMP-0069-00270-3, "SIMPLE SWITCHER® Power Converter 150 KHz 3A Step-Down Voltage Regulator, 5-pin TO-263", Manufacturer="Texas Instruments", PackageTopMarking="NSUZXYTTE#*LM2596S*-5.0 P+", PowerWise=N, Code_JEDEC=MO-169-AB, ComponentLink1Description="Datasheet URL", ComponentLink1URL=http://www.ti.com/general/docs/lit/getliterature.tsp?genericPartNumber=LM2596&fileType=pdf, CompType=Switcher, PackageDescription="TO-263, Molded, .400 x .390 x .180in, 5 Lead, .067in Pitch, Surface Mount", PackageReference=KTT0005B, PinCount=5, RoHS=N
U3: library part CMP-209535-000001-1, "LDO Voltage Regulators 1A, 3.3V", Dropout Voltage=1.1V, Manufacturer="Advanced Monolithic Systems", Max Junction Temp=+125°C, Max Power Dissipation=1.2W, Max Supply Voltage=15V, Nominal Supply Current=5mA, Output Current=1A, Output Voltage=3.3V, Package=AMS1117, Temperature="-40°C to +125°C", Temperature Range Low=-40°C, Automotive=No, Category=IC, ComponentLink2Description=Datasheet, ComponentLink2URL=http://www.advanced-monolithic.com/pdf/ds1117.pdf, Device Class L1="Integrated Circuits (ICs)", Device Class L2="Power Management ICs", Device Class L3="Voltage Regulators - Linear", Height=1.8mm, Lead Free=Yes, Manufacturer Part Number=AMS1117-3.3, Number Of Outputs=1, Octopart=https://octopart.com/ams1117-3.3-advanced+monolithic+systems-25899300, Output Type=Fixed, RoHS=TRUE, Standoff Height=0.64mm, Temperature Range High=+125°C, Ipc Land Pattern Name=SOT229P700X180-4
U4: library part CMP-1753-00002-2, "3-Axis Gyroscope, Accelerometer and a Digital Motion Processor(TM) (DMP), 2.375 to 3.46 V, -40 to 85 degC, 24-Pin QFN, RoHS, Tape and Reel", Manufacturer=InvenSense, Standard Package=5,000, Category=Sensors,Transducers, Datasheet URL=http://datasheet.octopart.com/MPU-6050-InvenSense-datasheet-14421344.pdf, Datasheet Version="Rev. 3.3, 05/2012", Dynamic Catalog=MPU-6000™Series, Family=Multifunction, Featured Product=MPU-60506-Axis,IntegratedI²CSolution, Manufacturer URL=http://www.invensense.com/, Online Catalog=MPU-6000™Series, Other Names="1428-1007-2 / MPU6050", Output Type=Digital, Sensor Type=MotionTracking, Unit PriceUSD=Digital
U5: library part CMP-04915-000025-1, "IC MOTOR DRIVER 8V-60V 28HTSSOP", Case/Package=HTSSOP, Max Operating Temperature=125°C, Max Supply Voltage=60V, Min Operating Temperature=-40°C, Min Supply Voltage=8V, Output Current=1.75A, Package Quantity=2000, Lead Free="Lead Free", Logic Function="AND GATE", Mount="Surface Mount", Number Of Outputs=1, Number of Pins=28, Packaging="Tape and Reel", Series=-, Interface=Parallel
Y: "24MHz Â±10ppm Crystal 9pF 40 Ohms 4-SMD, No Lead", Package="SMD-4 EPSON", Availability=Unavailable, MF=EPSON, MP="TSX-3225 24.0000MF15X-AC3", Price=None, SnapEDA_Link=https://www.snapeda.com/parts/TSX-3225%2024.0000MF15X-AC3/EPSON/view-part/230042/?ref=snap

## Via types
v1: diameter 1.27, hole 0.711, Top to Bottom, 44 vias
v2: diameter 0.5, hole 0.2, Top to Bottom, 4 vias

## Nets (pads, with @x,y where several pads share a name; then routed paths per layer and width w, separated by ;. In a path a pad name is that pad's centre, name@x,y a point inside that pad or via, vN(x,y) a via of type N, cw(c..) or ccw(c..) an arc to the next point about the centre after c; other vN are vias at no path point)
3V3: C1.2 C2.2 C3.2 FB1.1 P1.2 P2.1 U1.24 U1.36 U1.48 | length 96.8
  Top w0.254: FB1.1 59.32,47.171 59.593,46.898 59.793,46.898 60.463,46.228 C1.2 ; v1(63.881,53.848) P1.2
  PWR w0.254: v1(59.055,40.894) 62.865,40.894 C3.2 ; C1.2 63.577,47.829 63.577,50.982 63.104,51.456 63.104,53.071 v1(63.881,53.848)
  Bottom w0.254: C2.2 48.314,53.921 48.314,53.369 55.133,46.55 55.133,45.906 54.678,45.451 54.546,45.451 52.633,43.538 52.633,39.182 53.131,38.685 53.803,38.685 55.18,40.062 55.18,40.326 55.741,40.887 55.741,46.789 56.188,47.236 ; U1.48 54.273,50.164 54.446,49.991 54.446,49.941 54.55,49.837 55.705,49.837 56.188,49.354 56.188,47.236 ; v1(59.055,40.894) 58.861,41.088 58.226,41.088 56.188,43.126 56.188,47.236 ; U1.24 59.773,53.114 60.6,52.287 60.65,52.287 60.823,52.114 U1.36 62.984,52.114 63.579,51.518 64.252,51.518 64.728,51.994 64.728,52.667 64.075,53.319 64.075,53.654 v1(63.881,53.848) ; C3.2 63.881,44.323 C1.2 62.611,46.863 70.297,46.863 70.739,46.421 72.263,46.421 73.34,47.498 73.34,47.559 P2.1
+3V3: C10.2 C13.1 C18.1 P3.1 R3.2 R4.2 R7.2 R8.2 U3.4 | length 212.4
  Top w0.254: R4.2 29.841,15.505 30.164,15.828 30.164,16.702 30.507,17.045 30.507,17.099 31.161,17.753 31.215,17.753 32.131,18.669 34.29,18.669 v1(42.164,10.795) 40.729,9.36 36.338,9.36 36.276,9.298 35.352,9.298 35.29,9.36 32.681,9.36 31.75,10.291 R3.2 ; v1(47.244,59.436) 50.927,63.119 55.372,63.119 R7.2
  PWR w0.254: v1(42.164,10.795) 42.164,42.672 P3.1 28.702,59.436 v1(47.244,59.436)
  Bottom w0.254: C10.2 31.28,9.753 34.048,12.521 34.048,14.68 34.621,15.253 37.706,15.253 v1(42.164,10.795) 46.145,10.795 ; v1(47.244,59.436) 48.246,60.438 R8.2 ; C13.1 48.34,12.13 45.812,9.602 35.478,9.602 35.002,10.078 35.002,10.75 35.478,11.226 38.507,11.226 39.396,10.337 45.687,10.337 46.145,10.795 ; U3.4@52.537,26.275 52.124,26.275 46.113,20.264 34.101,20.264 30.811,16.973 30.811,16.301 31.555,15.557 41.891,15.557 46.294,11.154 46.294,10.944 46.145,10.795
+5: C11.2 C15.1 C16.1 L1.2 U2.4 U3.3 | length 41.7
  Top w0.254: v1(48.387,21.082) 50.8,23.495 C11.2 ; C11.2@53.148,23.62 53.875,24.347 57.735,24.347 59.274,22.808 59.274,25.216 C15.1 ; C16.1 59.274,20.146 U2.4@62.134,17.286 ; U2.4 62.534,16.989 62.186,17.337 62.186,17.765 61.779,18.171 61.779,19.615 63.811,19.615 v1(65.786,21.59)
  Bottom w0.254: v1(48.387,21.082) 49.784,19.685 U3.3 ; v1(65.786,21.59) 66.566,22.37 69,22.37 69.823,21.547 69.823,21.016 70.646,20.193 L1.2
+12: C8.1 C8.2 C9.1 C9.2 C20.2 C21.2 C22.1 C24.1 D1.1 Q1.3 U2.1 U5.4 U5.11 | length 339.5
  Top w0.254: C24.1 22.86,36.279 23.037,36.102 23.037,16.301 19.889,13.153 19.889,6.649 22.487,4.051 49.898,4.051 v1(51.435,5.588) 55.099,1.924 64.241,1.924 67.616,5.299 C9.1 ; U5.11 55.764,57.557 59.151,60.945 59.151,62.416 61.238,64.502 64.16,64.502 79.694,48.968 79.694,28.292 78.237,26.835 77.465,26.835 76.92,27.38 76.92,30.652 77.564,31.295 78.138,31.295 78.782,31.939 78.782,33.593 77.408,34.967 77.408,49.675 63.886,63.197 63.886,63.486 63.782,63.59 62.686,63.59 62.382,63.286 62.082,63.286 61.734,62.938 C20.2 61.734,61.583 ; U5.4 60.355,56.969 60.355,57.606 60.718,57.969 60.718,58.967 60.021,59.664 60.021,60.524 60.063,60.567 60.063,60.704 60.497,61.137 61.288,61.137 61.734,61.583 ; v1(62.611,60.706) 61.734,61.583 ; U2.1 63.881,9.062 61.595,6.776 D1.1 61.595,5.947 62.243,5.299 C9.1 ; C9.2 C9.1
  PWR w0.254: v1(51.435,5.588) 62.396,16.549 62.396,27.243 64.658,29.505 64.658,40.2 61.199,43.659 61.199,46.55 61.926,47.277 61.926,50.418 62.611,51.103 v1(62.611,60.706) 62.611,66.019 62.103,66.527 62.103,66.562 61.834,66.831 v1(61.834,67.106)
  Bottom w0.254: C21.2 63.12,70.78 C22.1@64.316,69.584 ; C8.2 58.166,3.675 57.343,4.498 52.525,4.498 v1(51.435,5.588) 56.972,11.125 C8.1 58.166,12.375 60.522,14.731 Q1.3 ; v1(61.834,67.106) 61.834,67.318 63.556,69.04 63.772,69.04 C22.1@64.316,69.584 ; C22.1 C22.1@64.316,69.584
BOOT0: P1.1 R1.1 U1.45 | length 21.8
  Bottom w0.254: U1.45 55.773,51.064 U1.45@55.796,51.087 ; U1.45@55.797,51.087 55.946,51.236 55.946,51.287 56.05,51.391 63.277,51.391 63.453,51.214 64.378,51.214 64.555,51.391 64.61,51.391 64.759,51.54 64.759,51.595 65.032,51.868 65.032,52.793 64.759,53.065 64.759,54.484 64.907,54.632 64.907,55.062 65.532,55.687 65.593,55.687 P1.1 67.309,57.403 67.309,57.96 69.088,59.739 R1.1
CPH: C23.1 U5.2 | length 6.4
  Top w0.254: v1(60.838,60.323) 60.838,60.32 61.614,59.544 U5.2
  Bottom w0.254: C23.1 58.813,61.522 59.822,60.513 60.649,60.513 v1(60.838,60.323)
CPL: C23.2 U5.1 | length 7.8
  Top w0.254: U5.1 62.264,57.565 63.703,59.004 v1(63.805,59.004)
  Bottom w0.254: C23.2 61.087,61.722 61.681,61.128 61.681,60.488 62.677,59.492 63.042,59.492 63.53,59.004 v1(63.805,59.004)
DRV_FAULT: R8.1 U5.18 | length 28.3
  Top w0.254: v1(55.372,49.022) 55.372,49.297 55.764,49.689 U5.18
  Bottom w0.254: R8.1@50.431,61.775 49.923,61.267 47.927,61.267 46.432,59.772 46.432,59.1 49.956,55.576 50.442,55.576 50.592,55.726 51.516,55.726 51.866,56.076 51.866,57.707 52.1,57.941 53.446,57.941 53.55,57.837 53.55,50.337 54.354,49.533 54.586,49.533 55.097,49.022 v1(55.372,49.022)
NetC1_1: C1.1 C2.1 C3.1 C4.1 C5.2 C6.1 C7.1 C11.1 C12.2 C13.2 C14.1 C15.2 C16.2 C17.1 C19.2 C21.1 C22.2 D1.2 D2.2 J1.2 J2.2 P2.3 P3.4 R1.2 R2.1 R5.1 R6.1 S1.1 U1.19 U1.23 U1.35 U1.47 U2.3 U2.5 U2.6 U3.1 U4.18 U5.6 U5.7 U5.10 U5.14 U5.20 U5.28 U5.29 Y.2 Y.4 | length 540.9
  Top w0.254: J2.2 25.991,64.518 25.264,63.791 25.264,51.952 26.124,51.092 ; U4.18@26.71,11.546 U4.18@26.872,11.546 ; P3.4 26.124,51.092 ; v1(27.559,14.859) 29.595,14.859 29.614,14.878 30.364,14.878 30.811,15.325 30.811,16.973 31.287,17.449 31.959,17.449 32.435,16.973 32.435,16.089 30.732,14.386 30.732,13.713 31.907,12.537 32.954,12.537 34.265,11.226 36.15,11.226 36.626,10.75 36.626,10.078 36.15,9.602 35.478,9.602 35.416,9.664 33.027,9.664 32.377,10.314 32.377,11.314 32.273,11.418 30.256,11.418 ; C17.1 30.226,8.192 28.998,9.42 28.998,9.543 28.522,10.019 28.399,10.019 U4.18@26.872,11.546 ; Y.4@50.496,43.003 50.858,42.641 51.358,42.641 Y.2@52.655,41.344 ; Y.4 50.546,44.069 C2.1 ; v1(51.054,56.538) 51.232,56.538 51.951,57.257 53.417,57.257 U5.14@53.769,57.61 ; v1@51.169,56.503 52.474,55.198 52.474,54.968 53.376,54.066 U5.29@58.003,54.066 ; C19.2 49.772,48.121 ; 53.796,22.618 53.531,22.353 U2.6 52.781,15.289 46.676,9.184 46.676,8.83 v1(46.482,8.636) 32.255,8.636 30.256,10.635 30.256,11.418 ; C1.1@54.66,46.354 52.545,48.469 ; C12.2 55.056,25.741 54.307,24.992 53.17,24.992 52.866,24.688 ; C3.1 56.261,44.862 56.69,45.291 ; U5.10 56.414,56.324 56.012,55.923 57.866,55.923 58.361,56.417 U5.7@58.364,56.417 ; U5.20@57.035,51.277 57.035,53.098 U5.29@58.003,54.066 ; U5.20 57.064,48.165 57.047,48.148 ; U5.29 U5.29@58.003,54.066 ; C16.2 58.074,22.808 57.083,23.799 54.422,23.799 53.875,23.252 53.875,22.747 53.771,22.643 51.497,22.643 49.124,20.27 49.124,19.593 49.326,19.391 49.326,18.714 48.85,18.238 48.178,18.238 47.271,19.145 47.271,21.887 53.033,27.649 54.279,27.649 54.383,27.545 54.383,26.049 53.882,25.548 53.007,25.548 52.507,25.047 52.507,24.837 52.655,24.688 52.866,24.688 ; U5.7 U5.7@58.364,56.417 ; 58.706,47.307 58.097,46.698 ; 58.743,47.307 58.743,46.698 59.99,45.451 62.298,45.451 64.18,47.333 66.805,47.333 67.732,48.26 P2.3 73.025,44.196 C7.1 76.327,42.545 C5.2 ; U5.6 59.014,56.476 58.955,56.417 U5.7@58.364,56.417 ; C15.2 59.257,26.508 59.885,25.88 ; D1.2 61.595,3.726 60.643,4.678 60.643,12.971 62.105,14.433 62.105,14.941 62.453,15.289 U2.3 ; v1(63.916,52.33) 62.862,51.277 U5.28 62.264,51.914 60.112,54.066 58.364,54.066 U5.7@58.364,56.417 ; v1(66.548,15.748) 66.437,15.637 64.229,15.637 U2.3 ; R1.2 70.424,61.468 67.086,64.806 53.508,64.806 52.125,63.423 50.801,63.423 49.785,62.407 49.067,62.407 46.432,59.772 46.432,59.1 50.11,55.422 51.39,55.422 51.866,54.946 51.866,51.791 52.545,51.113 52.545,48.469 ; 26.124,51.092 26.124,53.089 26.667,53.632 27.435,53.632 28.958,52.109 28.958,48.005 30.481,46.482 C2.1 ; U4.18@26.872,11.546 27.22,11.546 27.793,10.973 29.811,10.973 30.256,11.418 ; C2.1 49.772,48.121 ; 49.772,48.121 50.424,48.773 52.241,48.773 52.545,48.469 ; 52.545,48.469 52.545,47.958 52.056,47.469 50.756,47.469 50.456,47.169 50.456,46.073 51.382,45.147 54.804,45.147 56.943,47.286 56.943,48.044 57.047,48.148 ; 52.866,24.688 54.433,24.688 55.605,25.86 59.865,25.86 J1.2 ; 56.69,45.291 57.369,45.291 62.005,40.655 69.078,40.655 69.788,39.945 69.788,39.049 69.155,38.416 68.725,38.416 67.068,36.76 63.811,36.76 C6.1 61.214,33.907 60.833,33.526 J1.2 ; 56.69,45.291 58.097,46.698 ; 57.047,48.148 57.993,48.148 58.097,48.044 58.097,46.698 ; J1.2 61.81,23.915 64.271,23.915 64.323,23.967 66.42,23.967 70.231,20.156 D2.2 70.114,18.689 U2.5 63.881,17.833 64.044,17.67 65.82,17.67 65.983,17.507 65.983,16.471 65.849,16.337 64.073,16.337 63.881,16.145 U2.3
  Bottom w0.254: R5.1 21.746,10.131 v1(20.701,11.176) 26.035,16.51 ; R6.1 24.816,18.952 25.522,18.246 25.525,18.246 26.158,17.613 26.158,7.829 26.62,7.367 26.62,6.649 27.096,6.173 27.768,6.173 28.244,6.649 28.244,7.321 27.768,7.797 27.328,7.797 26.766,8.359 26.766,14.066 v1(27.559,14.859) ; v1(46.482,8.636) 48.153,10.307 48.98,10.307 C13.2 ; C2.1 48.389,46.482 48.585,46.678 C2.1@48.606,46.678 ; v1(51.054,56.538) 51.133,56.617 51.133,57.404 51.974,58.245 53.572,58.245 54.773,57.044 U1.47 ; C21.1@55.372,67.08 55.372,63.236 57.273,61.335 ; U3.1 55.503,27.936 C4.1 50.103,35.306 52.327,33.082 54.042,33.082 56.261,35.301 C3.1 ; U1.19 57.273,61.335 ; U1.23 59.273,59.564 59.446,59.737 59.446,59.787 59.55,59.891 59.996,59.891 60.298,59.589 60.298,53.089 60.75,52.637 61.25,52.637 U1.35 63.357,52.614 63.641,52.33 v1(63.916,52.33) ; C6.1 61.47,34.163 61.688,34.381 66.258,34.381 S1.1 ; C22.2 70.092,68.084 74.007,64.169 ; v1(66.548,15.748) 67.782,15.748 69.687,13.843 R2.1 ; R1.2 74.007,64.169 ; 57.273,61.335 57.273,62.012 59.43,64.169 74.007,64.169
NetC4_2: C4.2 FB1.2 U1.20 U1.21 | length 170.5
  Top w0.254: C4.2 47.302,42.095 51.185,42.095 51.904,41.375 51.904,39.912 53.323,38.493 68.133,38.493 68.36,38.72 69.029,38.72 69.484,39.175 69.484,39.819 69.029,40.274 66.881,40.274 65.707,39.101 63.559,39.101 63.255,39.405 56.887,39.405 56.583,39.101 55.939,39.101 55.484,39.556 55.484,45.135 57.52,47.171 FB1.2
  Bottom w0.254: C4.2 37.282,38.537 30.047,38.537 26.997,41.587 26.997,42.233 27.101,42.337 27.321,42.337 53.372,68.388 58.487,68.388 60.581,66.294 62.17,66.294 62.646,66.77 62.646,67.7 63.682,68.736 70.68,68.736 77.585,61.831 77.585,61.105 77.071,60.591 71.635,60.591 71.485,60.741 71.485,62.461 70.081,63.865 59.556,63.865 57.773,62.082 U1.20 57.773,58.664 57.796,58.641 58.25,58.641 58.273,58.664 U1.21
NetC10_1: C10.1 U4.8 | length 19.8
  Top w0.254: v1(22.479,6.731) 23.601,7.853 23.601,7.971 23.749,8.119 U4.8
  Bottom w0.254: v1(22.479,6.731) 23.341,5.869 26.54,5.869 26.844,5.565 28.02,5.565 28.852,6.397 28.852,7.573 28.02,8.405 27.58,8.405 27.374,8.611 27.374,9.975 28.372,10.973 28.466,10.973 29.091,11.599 29.091,11.692 30.252,12.853 30.449,12.853 31.544,13.948 v1(31.544,14.049)
NetC12_1: C12.1 U3.2 | length 16.2
  Top w0.254: v1(48.514,19.05) 47.575,19.989 47.575,21.418 52.406,26.249 53.233,26.249 53.656,26.672 C12.1
  Bottom w0.254: v1(48.514,19.05) 48.558,19.006 52.6,19.006 53.213,19.619 U3.2
NetC14_2: C14.2 U4.20 | length 20.5
  Top w0.254: U4.20 25.249,12.569 25.397,12.717 25.397,12.817 25.501,12.921 27.26,12.921 28.129,12.051 v1(28.129,11.785)
  Bottom w0.254: C14.2 25.854,12.262 25.854,7.703 26.127,7.43 26.127,7.142 26.316,6.953 26.316,6.523 26.97,5.869 27.894,5.869 28.548,6.523 28.548,7.447 27.894,8.101 27.454,8.101 27.07,8.485 27.07,10.941 27.914,11.785 v1(28.129,11.785)
NetC17_2: C17.2 U4.10 | length 5.5
  Top w0.254: U4.10 24.797,8.321 24.797,7.971 27.217,5.551 28.103,5.551 28.626,5.028 C17.2
NetC18_2: C18.2 U4.13 | length 12.1
  Top w0.254: U4.13 26.547,9.142 28.121,9.142 v1(28.186,9.207)
  Bottom w0.254: v1(28.186,9.207) 28.377,9.016 31.495,9.016 v1(35.179,12.7) 35.179,14.186 C18.2
NetC19_1: C19.1 U5.15 | length 10.4
  Top w0.254: C19.1 51.656,46.273 52.856,46.273 53.678,45.451 54.678,45.451 55.133,45.906 55.133,47.502 53.814,48.821 U5.15
NetC20_1: C20.1 U5.3 | length 10.6
  Top w0.254: U5.3 60.964,56.324 61.366,55.923 62.528,55.923 64.693,58.088 64.693,60.178 64.135,60.736 64.135,61.837 C20.1
NetC24_2: C24.2 J2.1 | length 12.1
  Top w0.254: C24.2 22.935,58.204 23.458,58.727 23.458,63.654 25.576,65.772 26.552,65.772 26.856,65.468 27.833,65.468 J2.1
NetD2_1: D2.1 L1.1 U2.2 | length 24.8
  Top w0.254: v1(66.675,10.414) 66.675,11.715 65.576,12.813 65.576,13.241 65.228,13.589 U2.2 65.331,13.589 66.758,12.162 D2.1
  Bottom w0.254: v1(66.675,10.414) 69.421,13.16 70.313,13.16 70.417,13.264 70.417,14.672 68.177,16.912 L1.1
NetJ1_1: J1.1 Q1.2 | length 9.2
  Bottom w0.254: Q1.2 62.922,17.172 62.341,17.753 62.341,23.86 J1.1
NetJ3_1: J3.1 U5.5 | length 36
  Top w0.254: U5.5 59.664,56.29 60.125,55.829 60.702,55.829 61.07,55.461 65.992,55.461 69.888,51.565 69.888,48.562 72.736,45.714 74.256,45.714 77.104,42.867 77.104,36.905 76.865,36.666 76.865,33.752 J3.1
NetJ3_2: J3.2 U5.8 | length 51.4
  Top w0.254: U5.8 57.714,57.565 59.462,59.313 59.462,60.395 59.759,60.693 59.759,62.164 61.186,63.59 62.256,63.59 62.56,63.894 63.908,63.894 64.19,63.612 64.19,63.323 78.782,48.731 78.782,34.023 79.086,33.719 79.086,31.813 78.782,31.509 78.782,31.197 J3.2
NetJ3_3: J3.3 U5.9 | length 55.2
  Top w0.254: U5.9 57.064,57.565 59.158,59.659 59.158,60.521 59.455,60.819 59.455,62.29 61.06,63.894 62.13,63.894 62.434,64.198 64.034,64.198 64.494,63.738 64.494,63.449 79.086,48.857 79.086,34.149 79.39,33.845 79.39,31.687 79.086,31.383 79.086,30.184 77.851,28.949 J3.3
NetP3_2: P3.2 R9.2 | length 16.6
  Top w0.254: P3.2 30.607,51.689 v1(30.607,48.26)
  Bottom w0.254: R9.2 26.547,41.983 26.547,42.033 26.693,42.179 26.693,42.359 26.975,42.641 27.155,42.641 30.607,46.093 v1(30.607,48.26)
NetP3_3: P3.3 R10.2 | length 26.7
  Top w0.254: R10.2 24.866,27.936 27.978,31.048 27.978,51.778 P3.3
NetQ1_1: Q1.1 R2.2 | length 6.8
  Bottom w0.254: Q1.1 66.922,14.222 67.578,14.222 R2.2
NetR5_2: R5.2 U4.9 | length 8.7
  Top w0.254: v1(22.479,5.207) 24.249,6.977 U4.9
  Bottom w0.254: R5.2 20.193,7.493 v1(22.479,5.207)
NetR6_2: R6.2 U4.11 | length 20.9
  Top w0.254: U4.11 25.249,8.119 25.397,7.971 25.397,7.871 26.283,6.985 v1(27.432,6.985)
  Bottom w0.254: R6.2 24.714,17.399 24.008,18.104 24.005,18.104 23.884,18.226 23.884,19.678 23.988,19.781 25.542,19.781 26.462,18.862 26.462,7.955 v1(27.432,6.985)
NetR7_1: R7.1 U5.16 U5.17 | length 23.3
  Top w0.254: U5.16 54.423,51.318 54.423,51.955 52.418,53.959 52.418,54.394 52.17,54.642 52.17,54.842 ; U5.17 55.114,51.898 52.17,54.842 ; R7.1 58.322,60.637 56.862,59.177 52.545,59.177 50.242,56.874 50.242,56.202 50.718,55.726 51.516,55.726 52.17,55.072 52.17,54.842
NRST: C7.2 S1.2 U1.7 | length 71.4
  Top w0.254: C7.2 72.136,39.116 S1.2
  Bottom w0.254: U1.7 51.698,55.114 51.39,55.422 50.718,55.422 50.568,55.272 48.204,55.272 48.115,55.183 47.685,55.183 47.052,54.55 47.052,53.654 47.356,53.35 47.356,48.358 48.91,46.804 48.91,37.748 53.272,33.386 53.916,33.386 55.788,35.258 55.788,39.252 55.484,39.556 55.484,40.2 55.939,40.655 56.583,40.655 58.737,38.5 58.737,35.541 59.338,34.94 63.09,34.94 64.431,36.281 68.33,36.281 69.432,35.179 S1.2
OSC_IN: C5.1 U1.5 Y.3 | length 39.3
  Top w0.254: Y.3 52.826,43.053 53.852,42.027 53.852,40.709 53.548,40.405 53.548,39.578 v1(53.467,39.497) 53.742,39.497 54.138,39.101 55.509,39.101 55.813,38.797 56.709,38.797 57.013,39.101 63.129,39.101 63.433,38.797 68.007,38.797 C5.1
  Bottom w0.254: U1.5 52.323,54.114 52.15,53.941 52.1,53.941 51.566,53.407 51.248,53.407 v1(51.054,53.213) 51.996,52.271 51.996,50.52 55.133,47.383 55.133,46.98 55.437,46.676 55.437,45.78 54.804,45.147 54.672,45.147 52.937,43.412 52.937,41.857 53.467,41.327 v1(53.467,39.497)
OSC_OUT: C6.2 U1.6 Y.1 | length 31.4
  Top w0.254: Y.1 v1(50.546,39.243) 50.546,37.211 C6.2
  Bottom w0.254: v1(50.546,39.243) 50.546,46.382 50.242,46.686 50.242,50.894 47.356,53.78 47.356,54.424 47.811,54.879 48.486,54.879 49.567,53.798 50.242,53.798 v1(51.054,54.61) 51.056,54.612 52.771,54.612 U1.6
PWM1_H: U1.30 U5.27 | length 46.7
  Top w0.254: U5.27 61.614,50.639 62.165,50.088 64.78,50.088 65.465,49.403 v1(65.532,49.403)
  Bottom w0.254: U1.30 61.296,55.137 62.098,55.137 67.603,60.642 67.603,62.083 68.473,62.953 69.703,62.953 70.573,62.083 70.573,60.853 70.269,60.549 70.269,59.503 69.392,58.626 69.392,57.736 67.829,56.173 67.829,55.313 67.221,54.705 67.221,54.494 69.355,52.36 69.572,52.36 73.036,48.896 73.036,47.624 72.137,46.725 70.865,46.725 69.888,47.702 69.888,48.644 69.129,49.403 v1(65.532,49.403)
PWM1_L: U1.15 U5.26 | length 40.9
  Top w0.254: U5.26 60.964,50.674 61.373,50.265 61.558,50.265 62.039,49.784 63.246,49.784 v1(64.516,48.514)
  PWR w0.254: v1(53.594,61.468) 53.788,61.662 53.788,62.223 59.483,67.918 62.17,67.918 63.423,66.665 63.423,59.77 62.993,59.34 62.993,56.254 64.728,54.52 64.728,50.834 64.516,50.622 v1(64.516,48.514)
  Bottom w0.254: v1(53.594,61.468) 53.788,61.274 53.788,60.599 54.496,59.891 54.996,59.891 55.1,59.787 55.1,59.737 55.273,59.564 U1.15
PWM2_H: U1.31 U5.25 | length 52.1
  Top w0.254: U5.25 60.355,51.235 60.355,50.598 60.992,49.961 61.432,49.961 61.913,49.48 61.955,49.48 62.463,48.972 v1(62.738,48.972)
  Bottom w0.254: U1.31 61.296,54.637 62.028,54.637 67.907,60.516 67.907,61.957 68.599,62.649 69.577,62.649 70.269,61.957 70.269,60.979 69.965,60.675 69.965,59.629 67.917,57.581 67.917,57.151 67.525,56.759 67.525,55.439 67.243,55.157 66.743,55.157 66.665,55.079 65.784,55.079 65.515,54.81 65.515,54.38 65.367,54.232 65.367,53.317 65.64,53.044 65.64,52.761 66.345,52.056 69.446,52.056 72.732,48.77 72.732,47.75 72.011,47.029 70.991,47.029 70.192,47.828 70.192,48.77 68.747,50.215 63.542,50.215 63.352,50.024 63.352,49.795 62.738,49.181 v1(62.738,48.972)
PWM2_L: U1.16 U5.24 | length 22.8
  Top w0.254: U5.24 59.664,50.639 60.222,50.082 60.222,50.014 v1(61.087,49.149)
  PWR w0.254: v1(54.982,62.268) 55.168,62.268 58.216,59.22 58.216,52.02 v1(61.087,49.149)
  Bottom w0.254: v1(54.982,62.268) 54.982,61.993 54.425,61.436 54.425,60.392 54.622,60.195 55.122,60.195 55.142,60.175 55.212,60.175 55.6,59.787 55.6,59.737 55.75,59.587 55.75,59.137 U1.16
PWM3_H: U1.32 U5.23 | length 52.7
  Top w0.254: U5.23 59.014,49.973 59.563,49.424 v1(59.563,49.149)
  Bottom w0.254: v1(59.563,49.149) 60.502,50.088 62.356,50.088 62.787,50.519 68.873,50.519 70.496,48.896 70.496,47.954 71.117,47.333 71.885,47.333 72.428,47.876 72.428,48.644 70.78,50.292 70.231,50.292 68.771,51.752 66.219,51.752 65.336,52.635 65.336,52.918 65.063,53.191 65.063,54.358 65.211,54.506 65.211,54.936 65.658,55.383 66.539,55.383 66.617,55.461 67.117,55.461 67.221,55.565 67.221,56.885 67.613,57.277 67.613,57.834 69.596,59.817 69.596,60.736 69.965,61.105 69.965,61.831 69.451,62.345 68.725,62.345 68.211,61.831 68.211,60.39 62.108,54.287 61.896,54.287 61.723,54.114 U1.32
PWM3_L: U1.17 U5.22 | length 17.3
  Top w0.254: v1(57.912,49.276) 57.912,49.551 58.364,50.003 U5.22
  PWR w0.254: v1(55.301,60.987) 57.912,58.376 v1(57.912,49.276)
  Bottom w0.254: v1(55.301,60.987) 56.1,60.188 56.1,59.737 56.25,59.587 56.25,59.137 U1.17
SCL: R3.1 U1.43 U4.23 | length 90.7
  Top w0.254: U4.23 23.797,12.367 23.797,12.617 23.897,12.717 23.897,12.817 24.305,13.225 27.386,13.225 27.69,12.921 30.77,12.921 31.969,11.722 32.619,11.722 33.55,10.791 R3.1 33.677,10.414 v1(35.814,10.414)
  Bottom w0.254: v1(35.814,10.414) 36.089,10.414 36.52,9.983 45.763,9.983 48.637,12.857 49.864,12.857 52.832,15.825 53.261,15.825 59.356,21.919 59.356,24.796 62.699,28.14 66.655,28.14 72.288,33.773 72.718,33.773 73.542,34.597 73.542,35.761 72.718,36.585 72.288,36.585 70.362,38.512 64.148,38.512 61.272,41.388 61.272,44.519 56.796,48.995 56.796,49.606 56.62,49.782 56.62,50.011 56.773,50.164 U1.43
SDA: R4.1 U1.44 U4.24 | length 89.1
  Top w0.254: U4.24 23.297,12.367 23.297,12.717 24.285,13.705 R4.1 29.591,14.425 29.74,14.574 30.49,14.574 31.537,15.621 31.537,16.551 v1(31.623,16.637)